# Altium PCB Cabinet_Device.PcbDoc (part 1 of 4)
Units mil, origin at the board's own origin, x right, y up, seen from the top; angles counter-clockwise.
Board outline 17790 x 10695 mil, 4 copper layers (Top Layer, Ground, Internal Plane 1, Bottom Layer), stack 30.634 mil thick; 515 components, 346 nets, 1467 pads, 176 vias.
Unrouted connection lines stored in the file: 677.
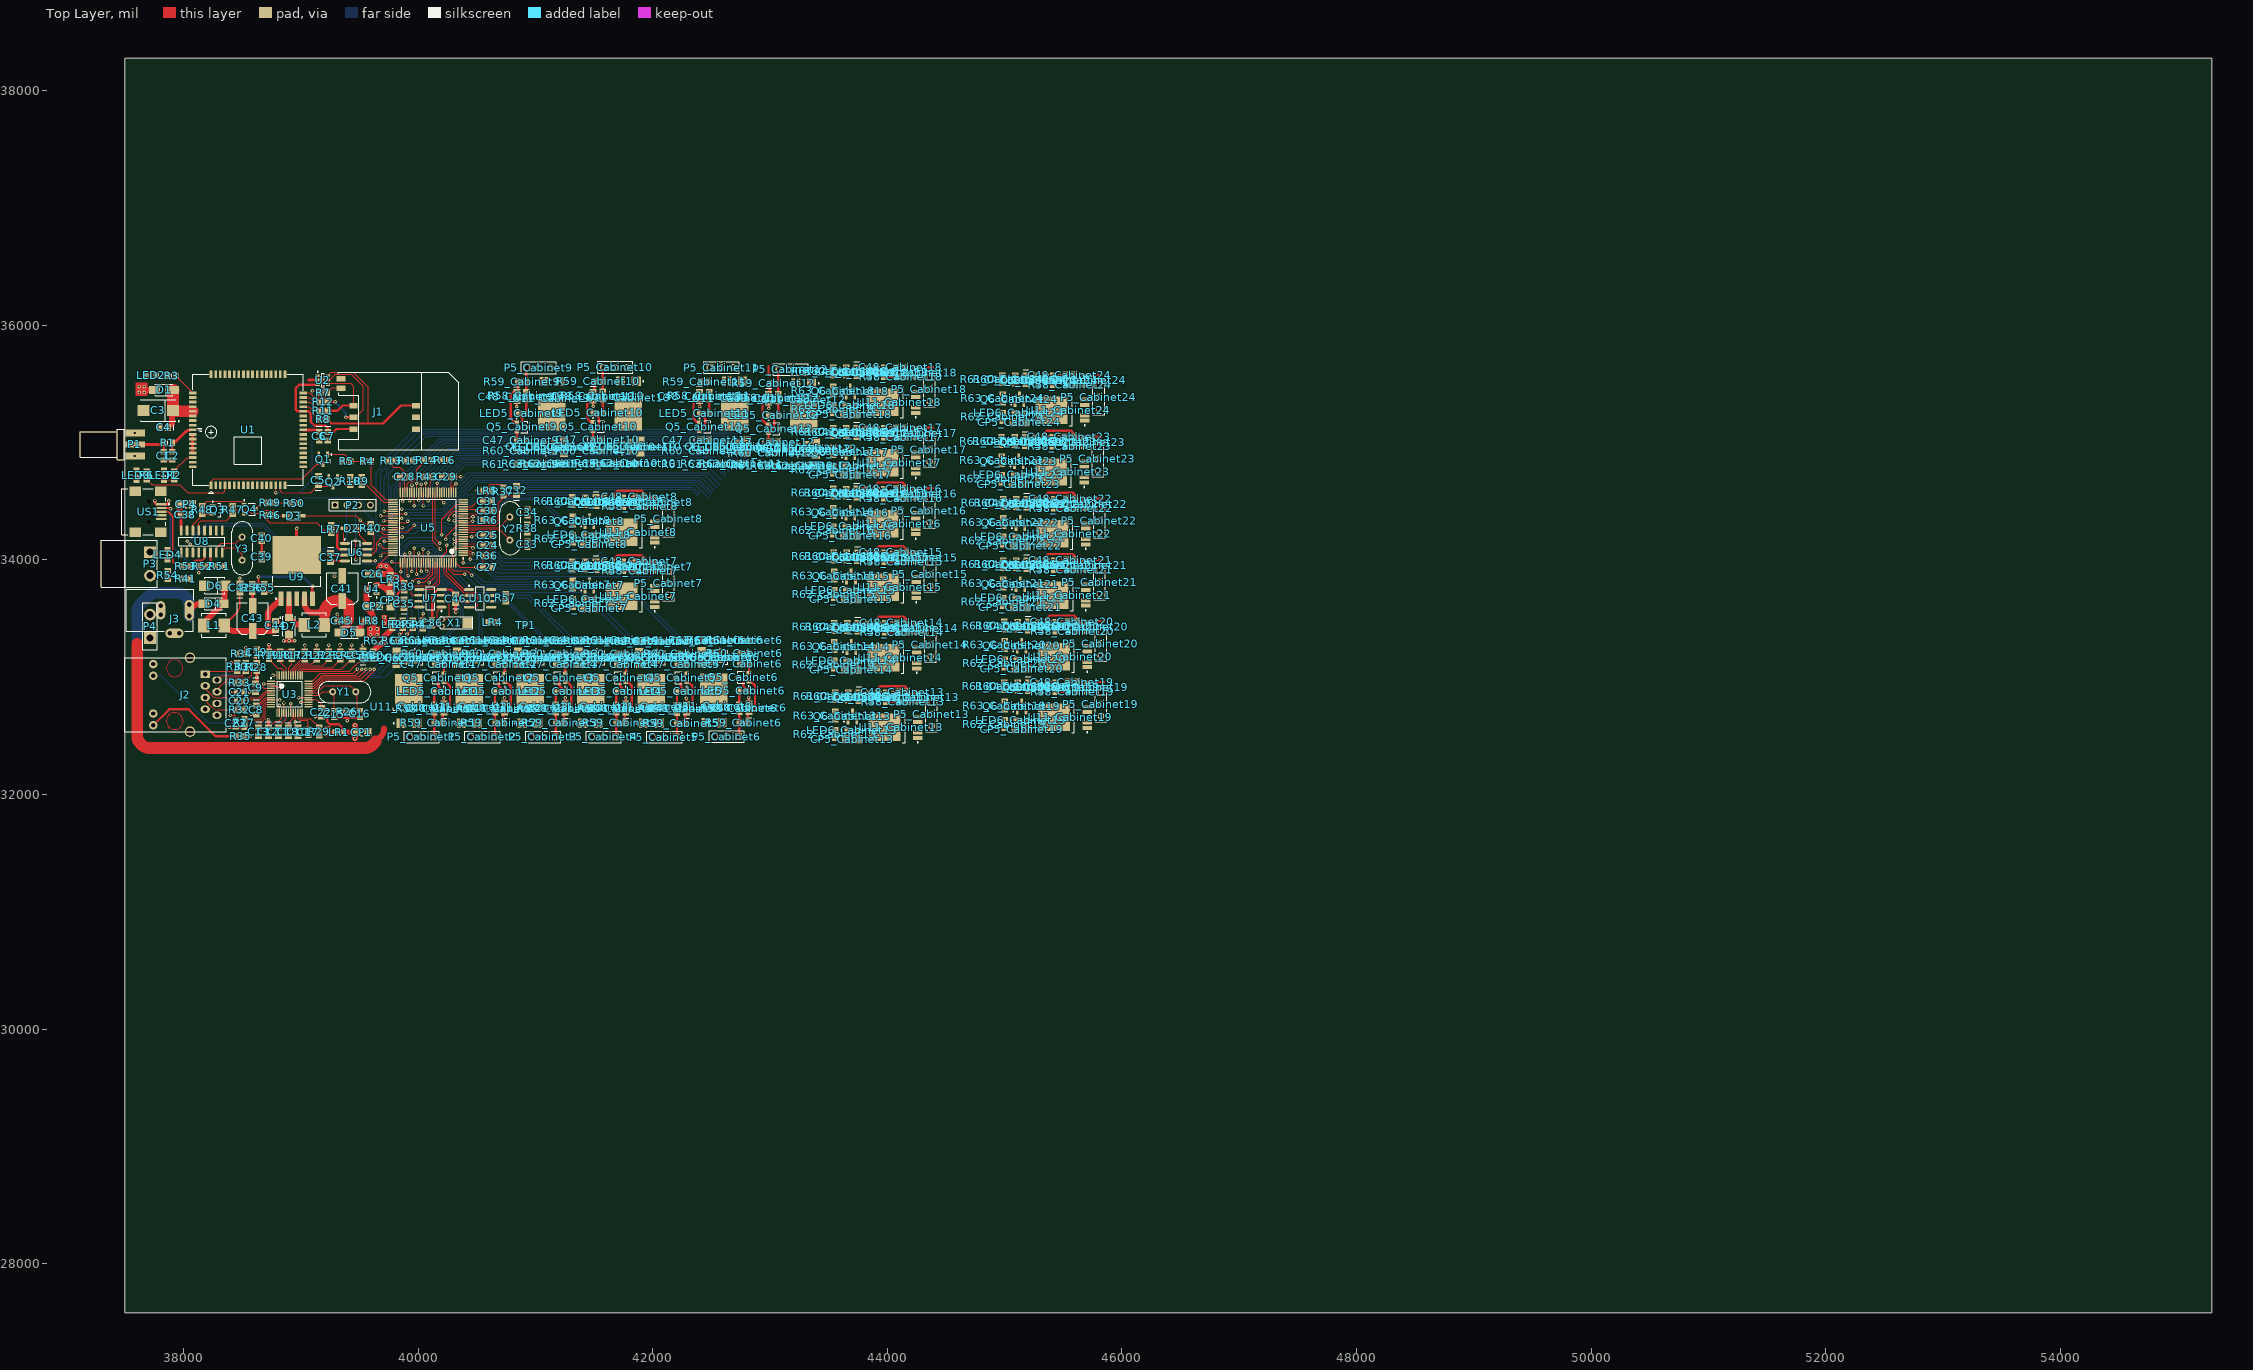
[diagram p0: Top Layer view]
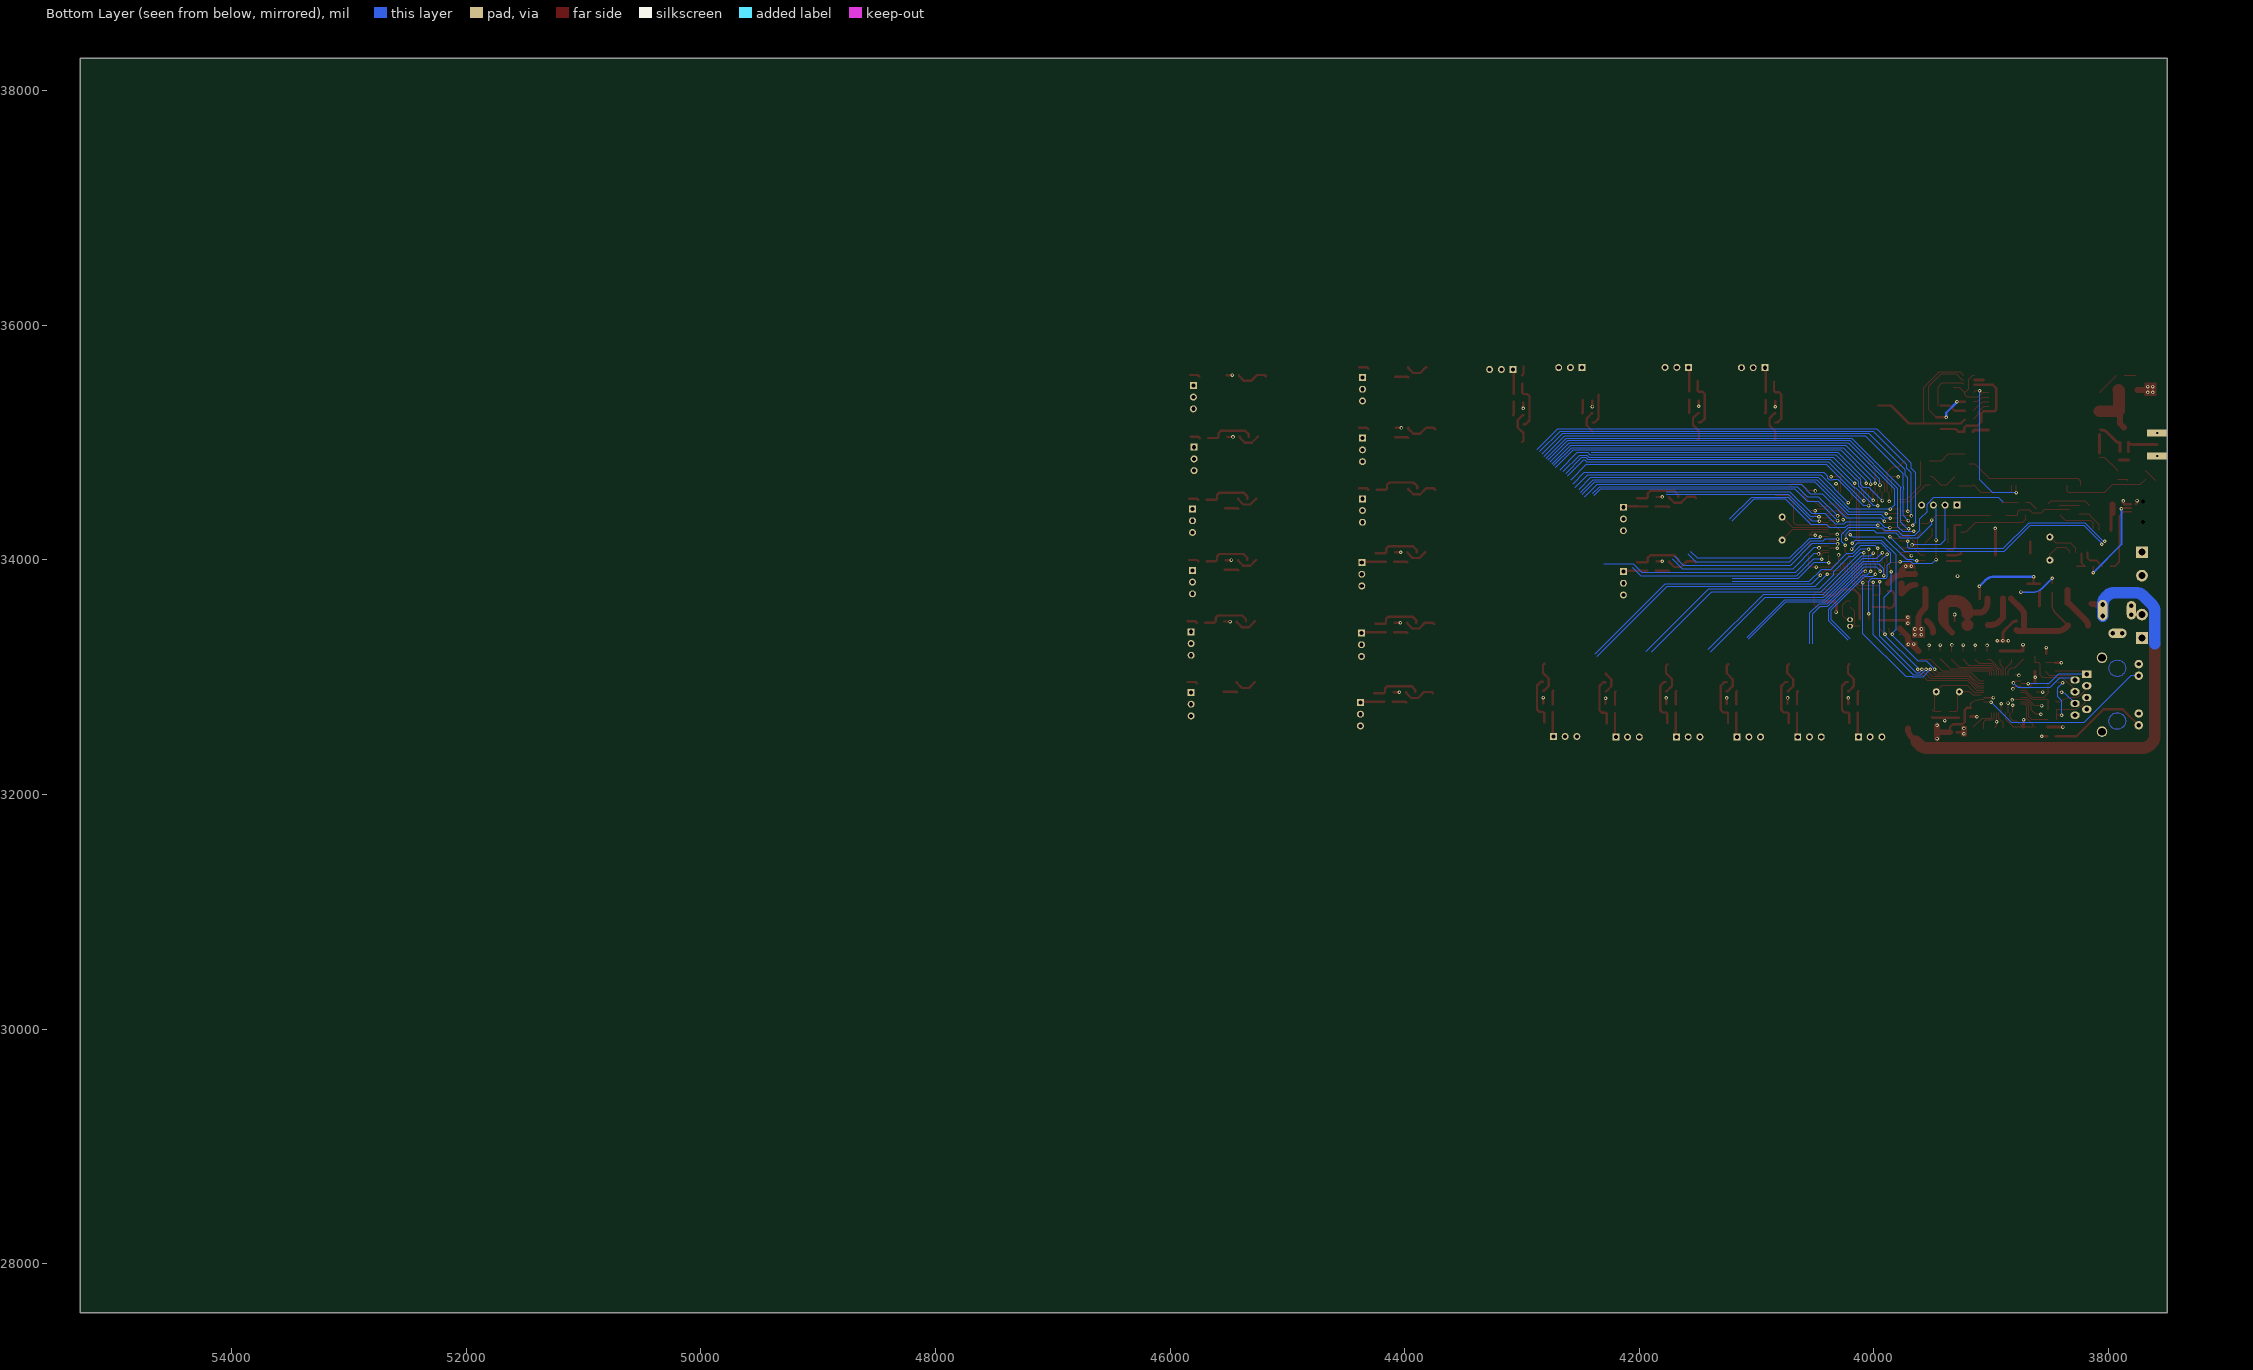
[diagram p1: Bottom Layer view, seen from below]
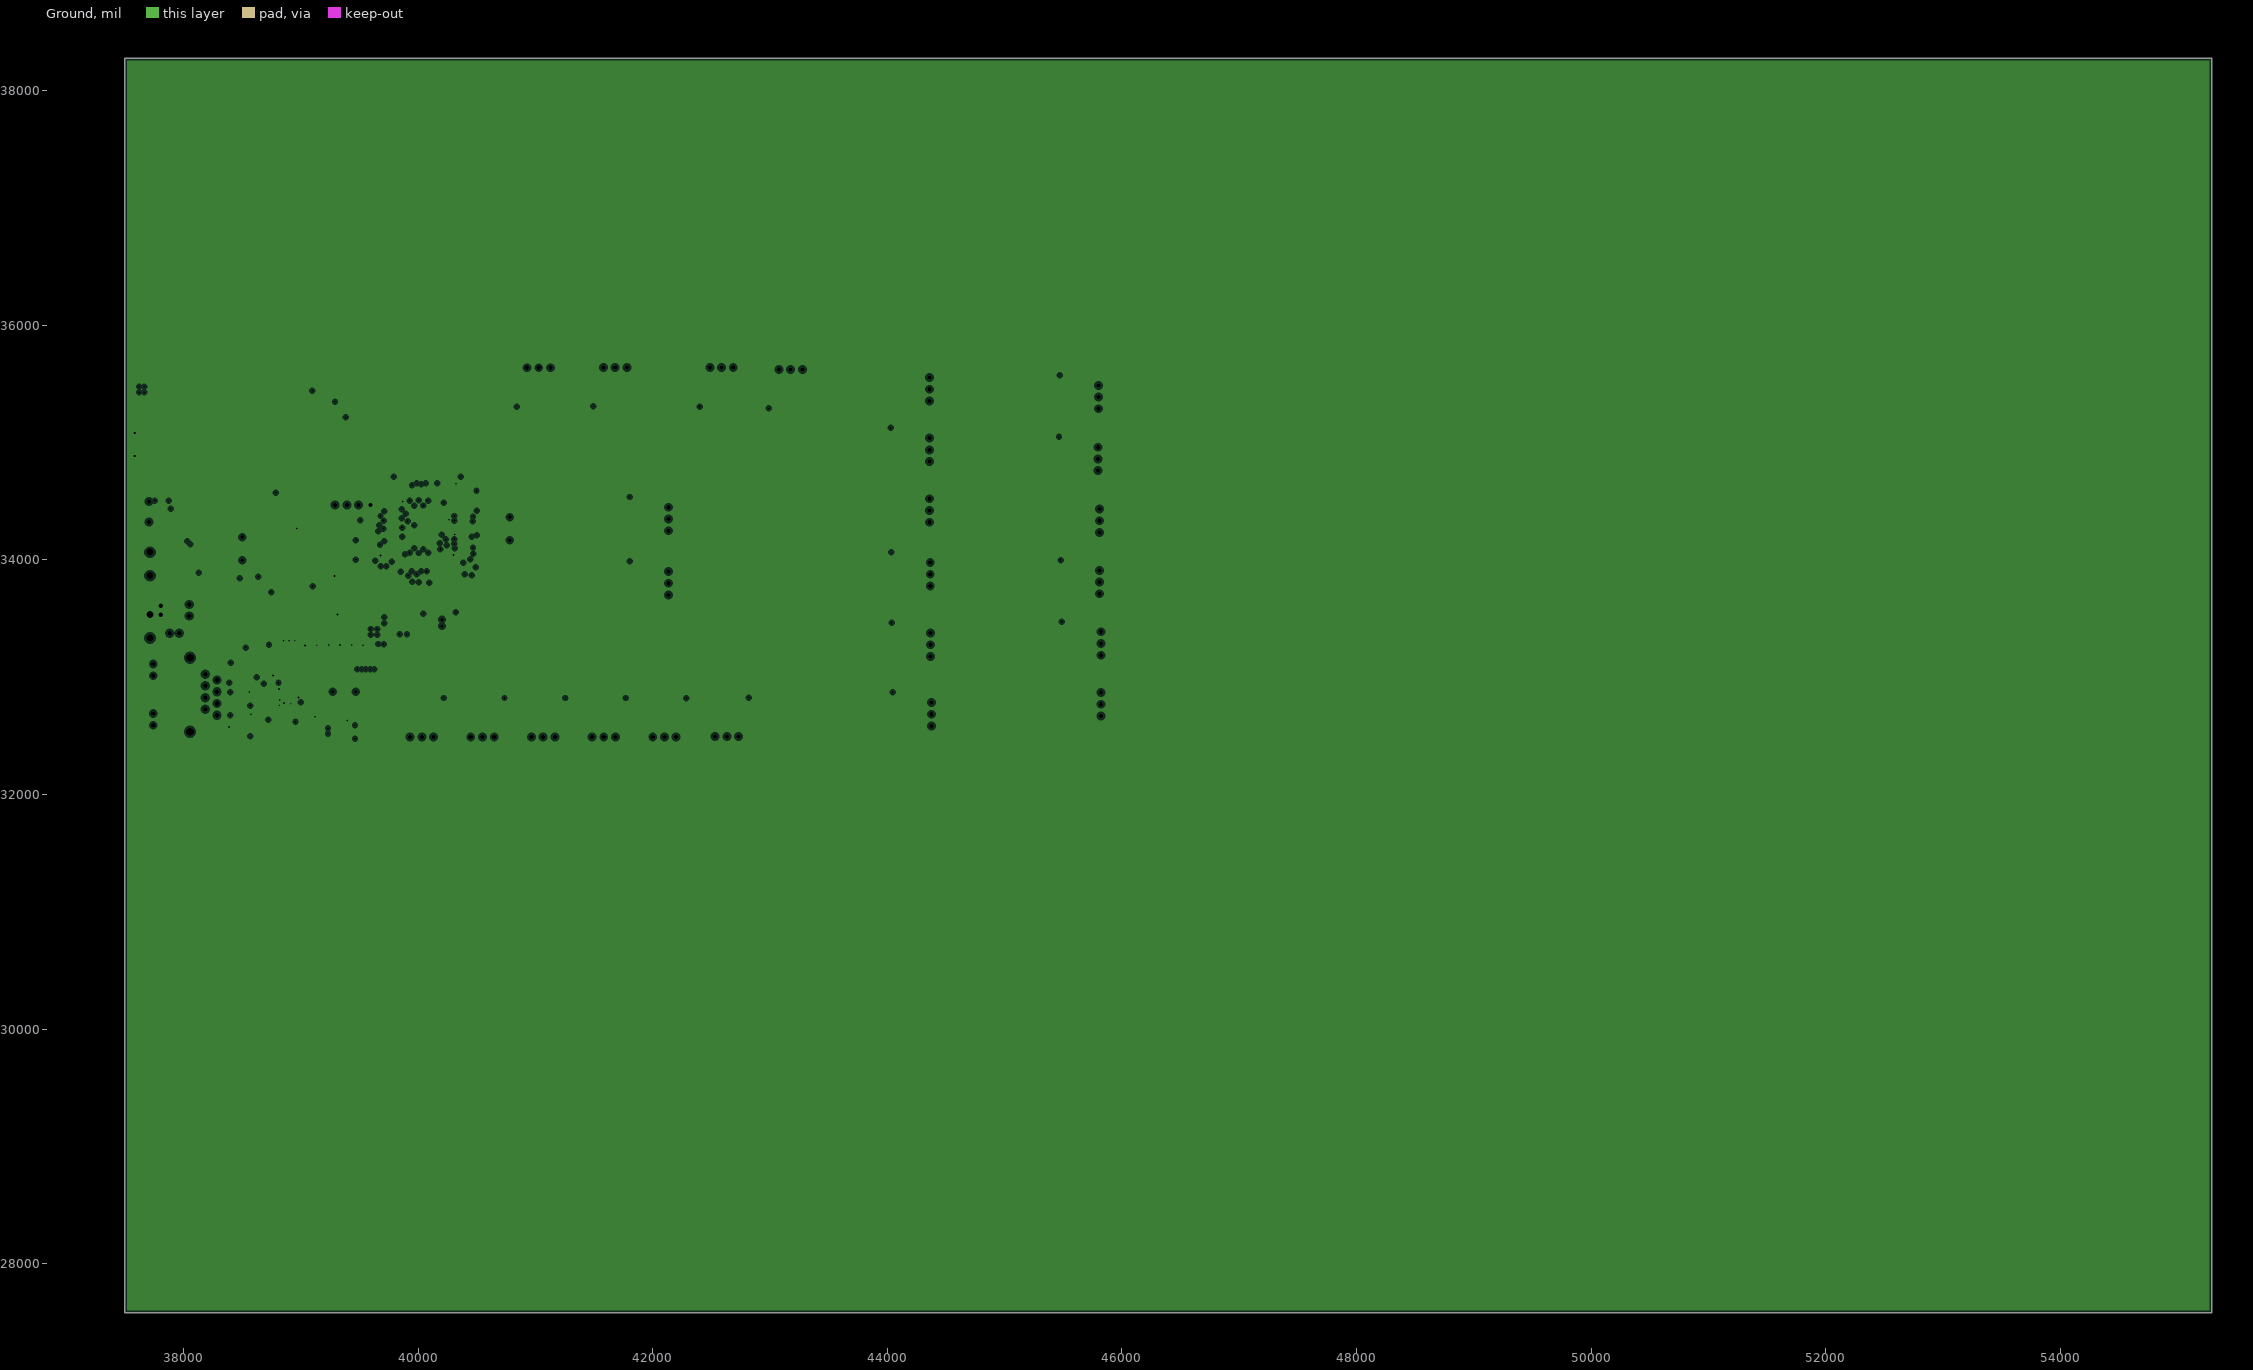
[diagram p2: Ground, clearances drawn from the general rule]
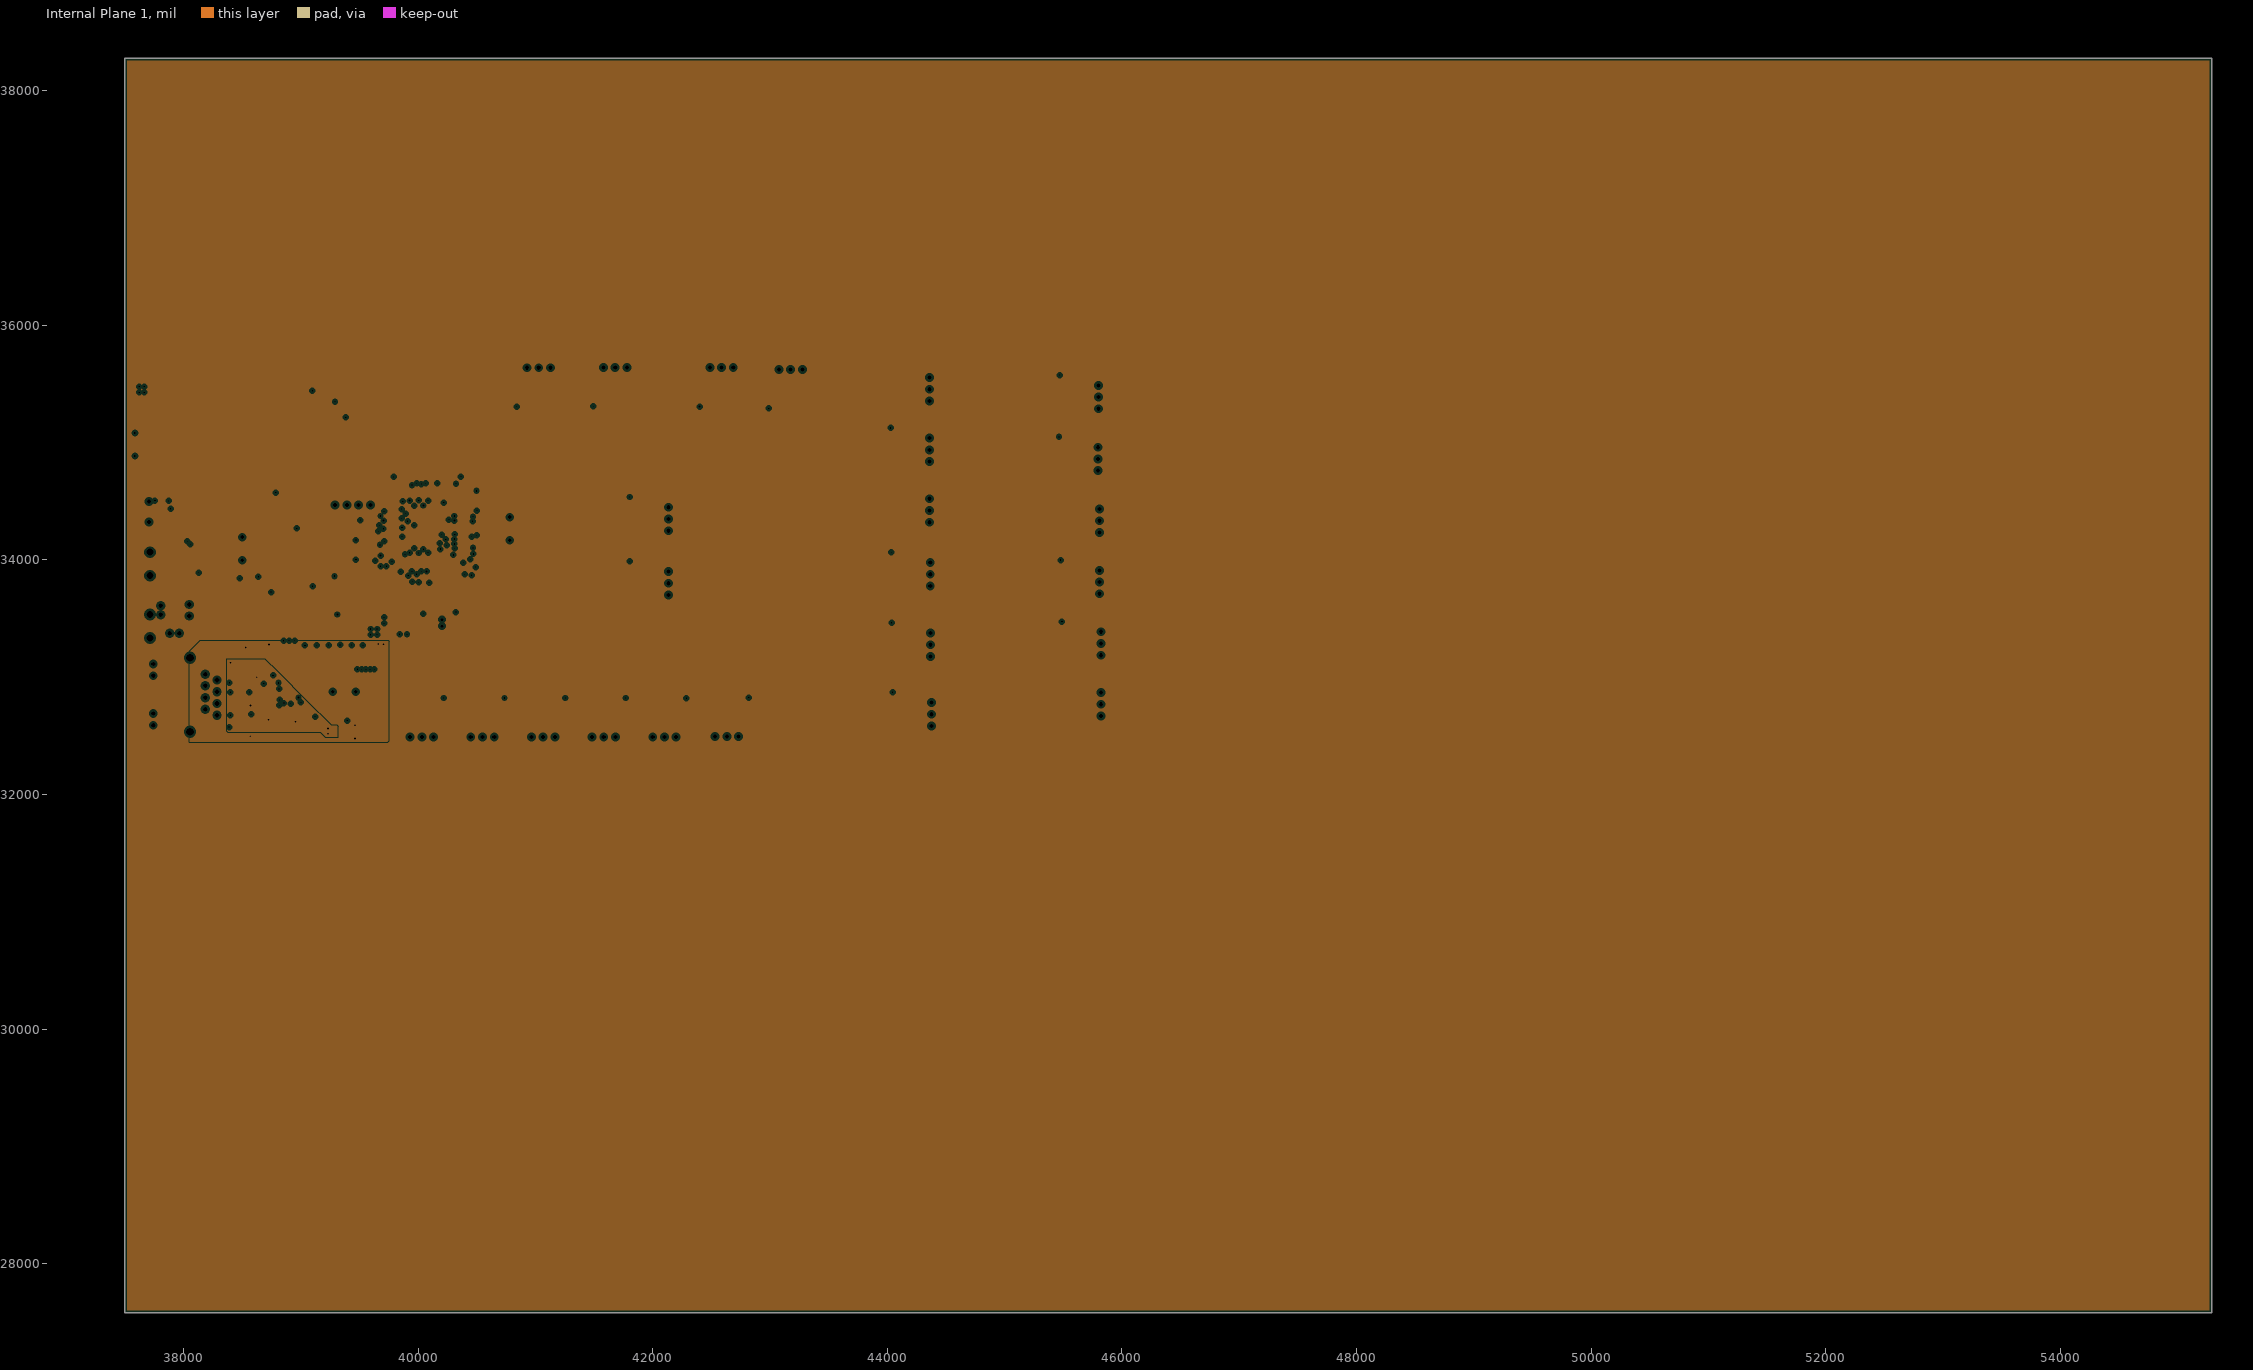
[diagram p3: Internal Plane 1, clearances drawn from the general rule]

## Layer stack, top to bottom
Top Solder: solder mask 0.4, Solder Resist, Dk 3.5
Top Layer: signal copper 1.4
Dielectric 1: core 10, FR-4, Dk 4.2
Ground: plane copper 1.417, net GND
Dielectric 3: core 10, Dk 4.2
Internal Plane 1: plane copper 1.417, net VDD3V3
Dielectric 4: prepreg 5, Dk 4.2
Bottom Layer: signal copper 1.4
Bottom Solder: solder mask 0.4, Solder Resist, Dk 3.5

## Board outline
37500,27580 55290,27580 55290,38275 37500,38275

## Design rules (kind name [scope] priority, off if disabled: settings)
Clearance [All] p1: gap=10
DiffPairsRouting [All] p1: maxlimit=10 minlimit=10 mostfreqgap=10 toplayer_minwidth=15 toplayer_maxwidth=15 toplayer_prefwidth=15 bottomlayer_minwidth=15 bottomlayer_maxwidth=15 bottomlayer_prefwidth=15 maxuncoupledlength=500
PlaneClearance [All] p1: clearance=20
PlaneConnect [All] p1: planeconnectstyle=Direct reliefexpansion=20 reliefentries=2 reliefconductorwidth=10 reliefairgap=10
PolygonConnect [All] p1: connectstyle=Relief reliefconductorwidth=10 reliefentries=4 polygonreliefangle="90 Angle" airgapwidth=10
RoomDefinition Cabinet24 [InComponentClass('Cabinet24')] p1: confinementstyle=ConfineIn formatcopy=TRUE lockcomponents=FALSE outline 45875,35122 45875,35639 44929.51,35639 44929.51,35122
RoomDefinition Cabinet23 [InComponentClass('Cabinet23')] p2: confinementstyle=ConfineIn formatcopy=TRUE lockcomponents=FALSE outline 45869,34595 45869,35112 44923.51,35112 44923.51,34595
RoomDefinition Cabinet22 [InComponentClass('Cabinet22')] p3: confinementstyle=ConfineIn formatcopy=TRUE lockcomponents=FALSE outline 45882,34068 45882,34585 44936.51,34585 44936.51,34068
RoomDefinition Cabinet21 [InComponentClass('Cabinet21')] p4: confinementstyle=ConfineIn formatcopy=TRUE lockcomponents=FALSE outline 45882.49,33545 45882.49,34062 44937,34062 44937,33545
RoomDefinition Cabinet20 [InComponentClass('Cabinet20')] p5: confinementstyle=ConfineIn formatcopy=TRUE lockcomponents=FALSE outline 45894,33021 45894,33538 44948.51,33538 44948.51,33021
RoomDefinition Cabinet19 [InComponentClass('Cabinet19')] p6: confinementstyle=ConfineIn formatcopy=TRUE lockcomponents=FALSE outline 45894,32504 45894,33021 44948.51,33021 44948.51,32504
RoomDefinition Cabinet18 [InComponentClass('Cabinet18')] p7: confinementstyle=ConfineIn formatcopy=TRUE lockcomponents=FALSE outline 44433,35189 44433,35706 43487.51,35706 43487.51,35189
RoomDefinition Cabinet17 [InComponentClass('Cabinet17')] p8: confinementstyle=ConfineIn formatcopy=TRUE lockcomponents=FALSE outline 44433,34672 44433,35189 43487.51,35189 43487.51,34672
RoomDefinition Cabinet16 [InComponentClass('Cabinet16')] p9: confinementstyle=ConfineIn formatcopy=TRUE lockcomponents=FALSE outline 44433,34155 44433,34672 43487.51,34672 43487.51,34155
RoomDefinition Cabinet15 [InComponentClass('Cabinet15')] p10: confinementstyle=ConfineIn formatcopy=TRUE lockcomponents=FALSE outline 44439,33612 44439,34129 43493.51,34129 43493.51,33612
RoomDefinition Cabinet14 [InComponentClass('Cabinet14')] p11: confinementstyle=ConfineIn formatcopy=TRUE lockcomponents=FALSE outline 44441.49,33011 44441.49,33528 43496,33528 43496,33011
RoomDefinition Cabinet13 [InComponentClass('Cabinet13')] p12: confinementstyle=ConfineIn formatcopy=TRUE lockcomponents=FALSE outline 44450.51,32418.76 44450.51,32935.76 43505.02,32935.76 43505.02,32418.76
RoomDefinition Cabinet12 [InComponentClass('Cabinet12')] p13: confinementstyle=ConfineIn formatcopy=TRUE lockcomponents=FALSE outline 43441,35696 42924,35696 42924,34750.51 43441,34750.51
RoomDefinition Cabinet11 [InComponentClass('Cabinet11')] p14: confinementstyle=ConfineIn formatcopy=TRUE lockcomponents=FALSE outline 42852,35712 42335,35712 42335,34766.51 42852,34766.51
RoomDefinition Cabinet10 [InComponentClass('Cabinet10')] p15: confinementstyle=ConfineIn formatcopy=TRUE lockcomponents=FALSE outline 41945,35714 41428,35714 41428,34768.51 41945,34768.51
RoomDefinition Cabinet9 [InComponentClass('Cabinet9')] p16: confinementstyle=ConfineIn formatcopy=TRUE lockcomponents=FALSE outline 41294,35711 40777,35711 40777,34765.51 41294,34765.51
RoomDefinition Cabinet8 [InComponentClass('Cabinet8')] p17: confinementstyle=ConfineIn formatcopy=TRUE lockcomponents=FALSE outline 42209,34083 42209,34600 41263.51,34600 41263.51,34083
RoomDefinition Cabinet7 [InComponentClass('Cabinet7')] p18: confinementstyle=ConfineIn formatcopy=TRUE lockcomponents=FALSE outline 42209,33535 42209,34052 41263.51,34052 41263.51,33535
RoomDefinition Cabinet6 [InComponentClass('Cabinet6')] p19: confinementstyle=ConfineIn formatcopy=TRUE lockcomponents=FALSE outline 42367,32420 42884,32420 42884,33365.49 42367,33365.49
RoomDefinition Cabinet5 [InComponentClass('Cabinet5')] p20: confinementstyle=ConfineIn formatcopy=TRUE lockcomponents=FALSE outline 41835,32415 42352,32415 42352,33360.49 41835,33360.49
RoomDefinition Cabinet4 [InComponentClass('Cabinet4')] p21: confinementstyle=ConfineIn formatcopy=TRUE lockcomponents=FALSE outline 41318,32416.51 41835,32416.51 41835,33362 41318,33362
RoomDefinition Cabinet3 [InComponentClass('Cabinet3')] p22: confinementstyle=ConfineIn formatcopy=TRUE lockcomponents=FALSE outline 40801,32416.51 41318,32416.51 41318,33362 40801,33362
RoomDefinition Cabinet2 [InComponentClass('Cabinet2')] p23: confinementstyle=ConfineIn formatcopy=TRUE lockcomponents=FALSE outline 40284,32416.51 40801,32416.51 40801,33362 40284,33362
RoomDefinition Cabinet1 [InComponentClass('Cabinet1')] p24: confinementstyle=ConfineIn formatcopy=TRUE lockcomponents=FALSE outline 39767,32416.51 40284,32416.51 40284,33362 39767,33362
RoomDefinition 中央处理器 [InComponentClass('中央处理器')] p25: confinementstyle=ConfineIn formatcopy=TRUE lockcomponents=FALSE outline 38968,33365 41036,33365 41036,34770 38968,34770
RoomDefinition 网络接口 [InComponentClass('网络接口')] p26: confinementstyle=ConfineIn formatcopy=TRUE lockcomponents=FALSE outline 37468.87,32451.24 39770.43,32451.24 39770.43,33314.9 37468.87,33314.9
RoomDefinition 系统电源 [InComponentClass('系统电源')] p27: confinementstyle=ConfineIn formatcopy=TRUE lockcomponents=FALSE outline 37145,32725 39745,32725 39745,34780 37145,34780
RoomDefinition 一键下载 [InComponentClass('一键下载')] p28: confinementstyle=ConfineIn formatcopy=TRUE lockcomponents=FALSE outline 37425,33795 41011,33795 41011,34655 37425,34655
RoomDefinition GSM接口 [InComponentClass('GSM接口')] p29: confinementstyle=ConfineIn formatcopy=TRUE lockcomponents=FALSE outline 37085,34551.34 40365,34551.34 40365,35666.34 37085,35666.34
RoomDefinition CAN接口 [InComponentClass('CAN接口')] p30: confinementstyle=ConfineIn formatcopy=TRUE lockcomponents=FALSE outline 40264,33394 40844,33394 40844,33839 40264,33839
RoutingVias [All] p1: holewidth=28 width=50 viastyle="Through Hole" minholewidth=10 minwidth=25 maxholewidth=28 maxwidth=50
SolderMaskExpansion [All] p1: expansion=4
UnpouredPolygon [All] p1: allowunpoured=FALSE
Width [All] p1: maxlimit=100 minlimit=10 preferedwidth=10
26 further rules are at their usual default settings.

## Classes and differential pairs
component class Cabinet1: C47_Cabinet1 C48_Cabinet1 CP5_Cabinet1 LED5_Cabinet1 LED6_Cabinet1 P5_Cabinet1 Q5_Cabinet1 Q6_Cabinet1 R58_Cabinet1 R59_Cabinet1 R60_Cabinet1 R61_Cabinet1 R62_Cabinet1 R63_Cabinet1 U11_Cabinet1
component class Cabinet2: C47_Cabinet2 C48_Cabinet2 CP5_Cabinet2 LED5_Cabinet2 LED6_Cabinet2 P5_Cabinet2 Q5_Cabinet2 Q6_Cabinet2 R58_Cabinet2 R59_Cabinet2 R60_Cabinet2 R61_Cabinet2 R62_Cabinet2 R63_Cabinet2 U11_Cabinet2
component class Cabinet3: C47_Cabinet3 C48_Cabinet3 CP5_Cabinet3 LED5_Cabinet3 LED6_Cabinet3 P5_Cabinet3 Q5_Cabinet3 Q6_Cabinet3 R58_Cabinet3 R59_Cabinet3 R60_Cabinet3 R61_Cabinet3 R62_Cabinet3 R63_Cabinet3 U11_Cabinet3
component class Cabinet4: C47_Cabinet4 C48_Cabinet4 CP5_Cabinet4 LED5_Cabinet4 LED6_Cabinet4 P5_Cabinet4 Q5_Cabinet4 Q6_Cabinet4 R58_Cabinet4 R59_Cabinet4 R60_Cabinet4 R61_Cabinet4 R62_Cabinet4 R63_Cabinet4 U11_Cabinet4
component class Cabinet5: C47_Cabinet5 C48_Cabinet5 CP5_Cabinet5 LED5_Cabinet5 LED6_Cabinet5 P5_Cabinet5 Q5_Cabinet5 Q6_Cabinet5 R58_Cabinet5 R59_Cabinet5 R60_Cabinet5 R61_Cabinet5 R62_Cabinet5 R63_Cabinet5 U11_Cabinet5
component class Cabinet6: C47_Cabinet6 C48_Cabinet6 CP5_Cabinet6 LED5_Cabinet6 LED6_Cabinet6 P5_Cabinet6 Q5_Cabinet6 Q6_Cabinet6 R58_Cabinet6 R59_Cabinet6 R60_Cabinet6 R61_Cabinet6 R62_Cabinet6 R63_Cabinet6 U11_Cabinet6
component class Cabinet7: C47_Cabinet7 C48_Cabinet7 CP5_Cabinet7 LED5_Cabinet7 LED6_Cabinet7 P5_Cabinet7 Q5_Cabinet7 Q6_Cabinet7 R58_Cabinet7 R59_Cabinet7 R60_Cabinet7 R61_Cabinet7 R62_Cabinet7 R63_Cabinet7 U11_Cabinet7
component class Cabinet8: C47_Cabinet8 C48_Cabinet8 CP5_Cabinet8 LED5_Cabinet8 LED6_Cabinet8 P5_Cabinet8 Q5_Cabinet8 Q6_Cabinet8 R58_Cabinet8 R59_Cabinet8 R60_Cabinet8 R61_Cabinet8 R62_Cabinet8 R63_Cabinet8 U11_Cabinet8
component class Cabinet9: C47_Cabinet9 C48_Cabinet9 CP5_Cabinet9 LED5_Cabinet9 LED6_Cabinet9 P5_Cabinet9 Q5_Cabinet9 Q6_Cabinet9 R58_Cabinet9 R59_Cabinet9 R60_Cabinet9 R61_Cabinet9 R62_Cabinet9 R63_Cabinet9 U11_Cabinet9
component class Cabinet10: C47_Cabinet10 C48_Cabinet10 CP5_Cabinet10 LED5_Cabinet10 LED6_Cabinet10 P5_Cabinet10 Q5_Cabinet10 Q6_Cabinet10 R58_Cabinet10 R59_Cabinet10 R60_Cabinet10 R61_Cabinet10 R62_Cabinet10 R63_Cabinet10 U11_Cabinet10
component class Cabinet11: C47_Cabinet11 C48_Cabinet11 CP5_Cabinet11 LED5_Cabinet11 LED6_Cabinet11 P5_Cabinet11 Q5_Cabinet11 Q6_Cabinet11 R58_Cabinet11 R59_Cabinet11 R60_Cabinet11 R61_Cabinet11 R62_Cabinet11 R63_Cabinet11 U11_Cabinet11
component class Cabinet12: C47_Cabinet12 C48_Cabinet12 CP5_Cabinet12 LED5_Cabinet12 LED6_Cabinet12 P5_Cabinet12 Q5_Cabinet12 Q6_Cabinet12 R58_Cabinet12 R59_Cabinet12 R60_Cabinet12 R61_Cabinet12 R62_Cabinet12 R63_Cabinet12 U11_Cabinet12
component class Cabinet13: C47_Cabinet13 C48_Cabinet13 CP5_Cabinet13 LED5_Cabinet13 LED6_Cabinet13 P5_Cabinet13 Q5_Cabinet13 Q6_Cabinet13 R58_Cabinet13 R59_Cabinet13 R60_Cabinet13 R61_Cabinet13 R62_Cabinet13 R63_Cabinet13 U11_Cabinet13
component class Cabinet14: C47_Cabinet14 C48_Cabinet14 CP5_Cabinet14 LED5_Cabinet14 LED6_Cabinet14 P5_Cabinet14 Q5_Cabinet14 Q6_Cabinet14 R58_Cabinet14 R59_Cabinet14 R60_Cabinet14 R61_Cabinet14 R62_Cabinet14 R63_Cabinet14 U11_Cabinet14
component class Cabinet15: C47_Cabinet15 C48_Cabinet15 CP5_Cabinet15 LED5_Cabinet15 LED6_Cabinet15 P5_Cabinet15 Q5_Cabinet15 Q6_Cabinet15 R58_Cabinet15 R59_Cabinet15 R60_Cabinet15 R61_Cabinet15 R62_Cabinet15 R63_Cabinet15 U11_Cabinet15
component class Cabinet16: C47_Cabinet16 C48_Cabinet16 CP5_Cabinet16 LED5_Cabinet16 LED6_Cabinet16 P5_Cabinet16 Q5_Cabinet16 Q6_Cabinet16 R58_Cabinet16 R59_Cabinet16 R60_Cabinet16 R61_Cabinet16 R62_Cabinet16 R63_Cabinet16 U11_Cabinet16
component class Cabinet17: C47_Cabinet17 C48_Cabinet17 CP5_Cabinet17 LED5_Cabinet17 LED6_Cabinet17 P5_Cabinet17 Q5_Cabinet17 Q6_Cabinet17 R58_Cabinet17 R59_Cabinet17 R60_Cabinet17 R61_Cabinet17 R62_Cabinet17 R63_Cabinet17 U11_Cabinet17
component class Cabinet18: C47_Cabinet18 C48_Cabinet18 CP5_Cabinet18 LED5_Cabinet18 LED6_Cabinet18 P5_Cabinet18 Q5_Cabinet18 Q6_Cabinet18 R58_Cabinet18 R59_Cabinet18 R60_Cabinet18 R61_Cabinet18 R62_Cabinet18 R63_Cabinet18 U11_Cabinet18
component class Cabinet19: C47_Cabinet19 C48_Cabinet19 CP5_Cabinet19 LED5_Cabinet19 LED6_Cabinet19 P5_Cabinet19 Q5_Cabinet19 Q6_Cabinet19 R58_Cabinet19 R59_Cabinet19 R60_Cabinet19 R61_Cabinet19 R62_Cabinet19 R63_Cabinet19 U11_Cabinet19
component class Cabinet20: C47_Cabinet20 C48_Cabinet20 CP5_Cabinet20 LED5_Cabinet20 LED6_Cabinet20 P5_Cabinet20 Q5_Cabinet20 Q6_Cabinet20 R58_Cabinet20 R59_Cabinet20 R60_Cabinet20 R61_Cabinet20 R62_Cabinet20 R63_Cabinet20 U11_Cabinet20
component class Cabinet21: C47_Cabinet21 C48_Cabinet21 CP5_Cabinet21 LED5_Cabinet21 LED6_Cabinet21 P5_Cabinet21 Q5_Cabinet21 Q6_Cabinet21 R58_Cabinet21 R59_Cabinet21 R60_Cabinet21 R61_Cabinet21 R62_Cabinet21 R63_Cabinet21 U11_Cabinet21
component class Cabinet22: C47_Cabinet22 C48_Cabinet22 CP5_Cabinet22 LED5_Cabinet22 LED6_Cabinet22 P5_Cabinet22 Q5_Cabinet22 Q6_Cabinet22 R58_Cabinet22 R59_Cabinet22 R60_Cabinet22 R61_Cabinet22 R62_Cabinet22 R63_Cabinet22 U11_Cabinet22
component class Cabinet23: C47_Cabinet23 C48_Cabinet23 CP5_Cabinet23 LED5_Cabinet23 LED6_Cabinet23 P5_Cabinet23 Q5_Cabinet23 Q6_Cabinet23 R58_Cabinet23 R59_Cabinet23 R60_Cabinet23 R61_Cabinet23 R62_Cabinet23 R63_Cabinet23 U11_Cabinet23
component class Cabinet24: C47_Cabinet24 C48_Cabinet24 CP5_Cabinet24 LED5_Cabinet24 LED6_Cabinet24 P5_Cabinet24 Q5_Cabinet24 Q6_Cabinet24 R58_Cabinet24 R59_Cabinet24 R60_Cabinet24 R61_Cabinet24 R62_Cabinet24 R63_Cabinet24 U11_Cabinet24
component class CAN接口: C46 P3 P4 R57 U10
component class GSM接口: C1 C2 C3 C4 C5 C6 C7 D1 J1 LED1 LED2 LED3 P1 Q1 Q2 R1 R2 R3 R4 R5 R6 R7 R8 R9 R10 R11 R12 R13 R14 R15 R16 U1 U2
component class 一键下载: C38 C39 C40 CP4 D3 LR7 P2 Q3 Q4 R46 R47 R48 R49 R50 R51 R52 R53 U8 US1 Y3
component class 系统电源: C41 C42 C43 C44 C45 D4 D5 D6 D7 J3 L1 L2 LED4 LR8 R54 R55 R56 U9
component class 网络接口: C8 C9 C10 C11 C12 C13 C14 C15 C16 C17 C18 C19 C20 C21 C22 C23 CP1 J2 LR1 R17 R18 R19 R20 R21 R22 R23 R24 R25 R26 R27 R28 R29 R30 R31 R32 R33 R34 R35 U3 Y1
component class 中央处理器: C24 C25 C26 C27 C28 C29 C30 C31 C32 C33 C34 C35 C36 C37 CP2 CP3 D2 LR2 LR3 LR4 LR5 LR6 R36 R37 R38 R39 R40 R41 R42 R43 R44 R45 TP1 U4 U5 U6 U7 X1 Y2
channel class Door: Cabinet1 Cabinet2 Cabinet3 Cabinet4 Cabinet5 Cabinet6 Cabinet7 Cabinet8 Cabinet9 Cabinet10 Cabinet11 Cabinet12 Cabinet13 Cabinet14 Cabinet15 Cabinet16 Cabinet17 Cabinet18 Cabinet19 Cabinet20 Cabinet21 Cabinet22 Cabinet23 Cabinet24
differential pair USB1: +USB1_P -USB1_N

## Components (designator, comment, footprint, x,y, rotation, side; value= is the part's Value field where it differs from the comment)
C1 "NC" 2012[0805] 37830,34886.91 r270 top
C2 "NC" 2012[0805] 37905,34886.91 r270 top
C3 "1000uF/6.3V" 7343[2917]CT 37785,35272.91 r180 top
C4 "CAP 100nF 50V 0805(2012)" 2012[0805]06CD 37832,35128 r180 top
C5 "CAP 100nF 50V 0805(2012)" 2012[0805]06CD 39150,34676.34 r90 top
C6 "CAP 100nF 50V 0805(2012)" 2012[0805]06CD 39157,35054 r270 top
C7 "CAP 100nF 50V 0805(2012)" 2012[0805]06CD 39230,35054 r270 top
C8 "CAP 100nF 50V 0805(2012)" 2012[0805]06CD 38620,32720 r270 top
C9 "CAP 100nF 50V 0805(2012)" 2012[0805]06CD 38615,32910 r270 top
C10 "CAP 100nF 50V 0805(2012)" 2012[0805]06CD 38975.43,32535 r270 top
C11 "CAP 100nF 50V 0805(2012)" 2012[0805]06CD 38810.43,32535 r270 top
C12 "CAP 100nF 50V 0805(2012)" 2012[0805]06CD 38723.76,32535 r270 top
C13 "CAP 100nF 50V 0805(2012)" 2012[0805]06CD 38640,32535 r270 top
C14 "CAP 100nF 50V 0805(2012)" 2012[0805]06CD 39530,33189 r90 top
C15 "CAP 18pF 50V 0805(2012)" 2012[0805]100_L 39285,32685 r90 top
C16 "CAP 18pF 50V 0805(2012)" 2012[0805]100_L 39504,32686 r90 top
C17 "CAP 10nF 50V 0805(2012)" 2012[0805]100_L 39065.43,32530 r90 top
C18 "CAP 4.7uF 50V 0805(2012)" 2012[0805]13CD 38895,32535 r270 top
C19 "CAP 22nF 50V 0805(2012)" 2012[0805]100_L 38625,33210 r270 top
C20 "CAP 6.8nF 50V 0805(2012)" 2012[0805]100_L 38478.76,32796.24 r180 top
C21 "CAP 6.8nF 50V 0805(2012)" 2012[0805]100_L 38478.76,32871.24 r180 top
C22 "CAP 100nF 50V 0805(2012)" 2012[0805]06CD 39175,32700 r270 top
C23 "CAP 10nF 50V 0805(2012)" 2012[0805]100_L 38445,32605 r90 top
C24 "CAP 100nF 50V 0805(2012)" 2012[0805]06CD 40594,34124 r0 top
C25 "CAP 100nF 50V 0805(2012)" 2012[0805]06CD 40594,34210 r0 top
C26 "CAP 100nF 50V 0805(2012)" 2012[0805]06CD 39610,33880 r180 top
C27 "CAP 100nF 50V 0805(2012)" 2012[0805]06CD 40592,33938 r0 top
C28 "CAP 100nF 50V 0805(2012)" 2012[0805]06CD 39885,34706 r0 top
C29 "CAP 100nF 50V 0805(2012)" 2012[0805]06CD 40241,34709 r180 top
C30 "CAP 100nF 50V 0805(2012)" 2012[0805]06CD 40593,34419 r0 top
C31 "CAP 100nF 50V 0805(2012)" 2012[0805]06CD 40592,34501 r0 top
C32 "CAP 100nF 50V 0805(2012)" 2012[0805]06CD 40839,34591 r90 top
C33 "CAP 18pF 50V 0805(2012)" 2012[0805]100_L 40932,34133 r270 top
C34 "CAP 18pF 50V 0805(2012)" 2012[0805]100_L 40932,34404 r90 top
C35 "CAP 100nF 50V 0805(2012)" 2012[0805]06CD 39880,33625 r90 top
C36 "CAP 18pF 50V 0805(2012)" 2012[0805]100_L 40119,33463 r90 top
C37 "CAP 100nF 50V 0805(2012)" 2012[0805]06CD 39255,34020 r270 top
C38 "CAP 100nF 50V 0805(2012)" 2012[0805]06CD 38015,34385 r0 top
C39 "CAP 18pF 50V 0805(2012)" 2012[0805]100_L 38668,34025 r90 top
C40 "CAP 18pF 50V 0805(2012)" 2012[0805]100_L 38667,34184 r270 top
C41 "UUD1A101MCL1GS" NIC-CAPA2-6.3X5.8_V 39355,33755 r90 top
C42 "CAP 100nF 50V 0805(2012)" 2012[0805]06CD 38480,33760 r90 top
C43 "UUD1E101MCL1GS" NIC-CAPA2-6.3X7.7_V 38590,33500 r90 top
C44 "CAP 100nF 50V 0805(2012)" 2012[0805]06CD 38785,33440 r90 top
C45 "CAP 100nF 50V 0805(2012)" 2012[0805]06CD 39350,33480 r180 top
C46 "0.1uF" 2012[0805]06CD 40320,33668 r90 top
C47_Cabinet1 "CAP 100nF 50V 0805(2012)" 2012[0805]06CD 40180.43,33109 r180 top (schematic designator C47)
C47_Cabinet2 "CAP 100nF 50V 0805(2012)" 2012[0805]06CD 40697.43,33109 r180 top (schematic designator C47)
C47_Cabinet3 "CAP 100nF 50V 0805(2012)" 2012[0805]06CD 41214.43,33109 r180 top (schematic designator C47)
C47_Cabinet4 "CAP 100nF 50V 0805(2012)" 2012[0805]06CD 41731.43,33109 r180 top (schematic designator C47)
C47_Cabinet5 "CAP 100nF 50V 0805(2012)" 2012[0805]06CD 42248.43,33107.49 r180 top (schematic designator C47)
C47_Cabinet6 "CAP 100nF 50V 0805(2012)" 2012[0805]06CD 42780.43,33112.49 r180 top (schematic designator C47)
C47_Cabinet7 "CAP 100nF 50V 0805(2012)" 2012[0805]06CD 41516.51,33948.43 r270 top (schematic designator C47)
C47_Cabinet8 "CAP 100nF 50V 0805(2012)" 2012[0805]06CD 41516.51,34496.43 r270 top (schematic designator C47)
C47_Cabinet9 "CAP 100nF 50V 0805(2012)" 2012[0805]06CD 40880.57,35018.51 r0 top (schematic designator C47)
C47_Cabinet10 "CAP 100nF 50V 0805(2012)" 2012[0805]06CD 41531.57,35021.51 r0 top (schematic designator C47)
C47_Cabinet11 "CAP 100nF 50V 0805(2012)" 2012[0805]06CD 42438.57,35019.51 r0 top (schematic designator C47)
C47_Cabinet12 "CAP 100nF 50V 0805(2012)" 2012[0805]06CD 43027.57,35003.51 r0 top (schematic designator C47)
C47_Cabinet13 "CAP 100nF 50V 0805(2012)" 2012[0805]06CD 43758.02,32832.2 r270 top (schematic designator C47)
C47_Cabinet14 "CAP 100nF 50V 0805(2012)" 2012[0805]06CD 43749,33424.43 r270 top (schematic designator C47)
C47_Cabinet15 "CAP 100nF 50V 0805(2012)" 2012[0805]06CD 43746.51,34025.43 r270 top (schematic designator C47)
C47_Cabinet16 "CAP 100nF 50V 0805(2012)" 2012[0805]06CD 43740.51,34568.43 r270 top (schematic designator C47)
C47_Cabinet17 "CAP 100nF 50V 0805(2012)" 2012[0805]06CD 43740.51,35085.43 r270 top (schematic designator C47)
C47_Cabinet18 "CAP 100nF 50V 0805(2012)" 2012[0805]06CD 43740.51,35602.43 r270 top (schematic designator C47)
C47_Cabinet19 "CAP 100nF 50V 0805(2012)" 2012[0805]06CD 45201.51,32917.43 r270 top (schematic designator C47)
C47_Cabinet20 "CAP 100nF 50V 0805(2012)" 2012[0805]06CD 45201.51,33434.43 r270 top (schematic designator C47)
C47_Cabinet21 "CAP 100nF 50V 0805(2012)" 2012[0805]06CD 45190,33958.43 r270 top (schematic designator C47)
C47_Cabinet22 "CAP 100nF 50V 0805(2012)" 2012[0805]06CD 45189.51,34481.43 r270 top (schematic designator C47)
C47_Cabinet23 "CAP 100nF 50V 0805(2012)" 2012[0805]06CD 45176.51,35008.43 r270 top (schematic designator C47)
C47_Cabinet24 "CAP 100nF 50V 0805(2012)" 2012[0805]06CD 45182.51,35535.43 r270 top (schematic designator C47)
C48_Cabinet1 "CAP 100nF 50V 0805(2012)" 2012[0805]06CD 40219.43,32736 r90 top (schematic designator C48)
C48_Cabinet2 "CAP 100nF 50V 0805(2012)" 2012[0805]06CD 40736.43,32736 r90 top (schematic designator C48)
C48_Cabinet3 "CAP 100nF 50V 0805(2012)" 2012[0805]06CD 41253.43,32736 r90 top (schematic designator C48)
C48_Cabinet4 "CAP 100nF 50V 0805(2012)" 2012[0805]06CD 41770.43,32736 r90 top (schematic designator C48)
C48_Cabinet5 "CAP 100nF 50V 0805(2012)" 2012[0805]06CD 42287.43,32734.49 r90 top (schematic designator C48)
C48_Cabinet6 "CAP 100nF 50V 0805(2012)" 2012[0805]06CD 42819.43,32739.49 r90 top (schematic designator C48)
C48_Cabinet7 "CAP 100nF 50V 0805(2012)" 2012[0805]06CD 41889.51,33987.43 r180 top (schematic designator C48)
C48_Cabinet8 "CAP 100nF 50V 0805(2012)" 2012[0805]06CD 41889.51,34535.43 r180 top (schematic designator C48)
C48_Cabinet9 "CAP 100nF 50V 0805(2012)" 2012[0805]06CD 40841.57,35391.51 r270 top (schematic designator C48)
C48_Cabinet10 "CAP 100nF 50V 0805(2012)" 2012[0805]06CD 41492.57,35394.51 r270 top (schematic designator C48)
C48_Cabinet11 "CAP 100nF 50V 0805(2012)" 2012[0805]06CD 42399.57,35392.51 r270 top (schematic designator C48)
C48_Cabinet12 "CAP 100nF 50V 0805(2012)" 2012[0805]06CD 42988.57,35376.51 r270 top (schematic designator C48)
C48_Cabinet13 "CAP 100nF 50V 0805(2012)" 2012[0805]06CD 44131.02,32871.2 r180 top (schematic designator C48)
C48_Cabinet14 "CAP 100nF 50V 0805(2012)" 2012[0805]06CD 44122,33463.43 r180 top (schematic designator C48)
C48_Cabinet15 "CAP 100nF 50V 0805(2012)" 2012[0805]06CD 44119.51,34064.43 r180 top (schematic designator C48)
C48_Cabinet16 "CAP 100nF 50V 0805(2012)" 2012[0805]06CD 44113.51,34607.43 r180 top (schematic designator C48)
C48_Cabinet17 "CAP 100nF 50V 0805(2012)" 2012[0805]06CD 44113.51,35124.43 r180 top (schematic designator C48)
C48_Cabinet18 "CAP 100nF 50V 0805(2012)" 2012[0805]06CD 44113.51,35641.43 r180 top (schematic designator C48)
C48_Cabinet19 "CAP 100nF 50V 0805(2012)" 2012[0805]06CD 45574.51,32956.43 r180 top (schematic designator C48)
C48_Cabinet20 "CAP 100nF 50V 0805(2012)" 2012[0805]06CD 45574.51,33473.43 r180 top (schematic designator C48)
C48_Cabinet21 "CAP 100nF 50V 0805(2012)" 2012[0805]06CD 45563,33997.43 r180 top (schematic designator C48)
C48_Cabinet22 "CAP 100nF 50V 0805(2012)" 2012[0805]06CD 45562.51,34520.43 r180 top (schematic designator C48)
C48_Cabinet23 "CAP 100nF 50V 0805(2012)" 2012[0805]06CD 45549.51,35047.43 r180 top (schematic designator C48)
C48_Cabinet24 "CAP 100nF 50V 0805(2012)" 2012[0805]06CD 45555.51,35574.43 r180 top (schematic designator C48)
CP1 "TAJA106K016RNJ" 3216[1206]CB 39517,32531 r0 top
CP2 "TAJA106K016RNJ" 3216[1206]CB 39615,33605 r0 top
CP3 "TAJA106K016RNJ" 3216[1206]CB 39765,33655 r270 top
CP4 "TAJA106K016RNJ" 3216[1206]CB 38020,34474 r0 top
CP5_Cabinet1 "TAJA106K016RNJ" 3216[1206]CB 39818,33165 r90 top (schematic designator CP5)
CP5_Cabinet2 "TAJA106K016RNJ" 3216[1206]CB 40335,33165 r90 top (schematic designator CP5)
CP5_Cabinet3 "TAJA106K016RNJ" 3216[1206]CB 40852,33165 r90 top (schematic designator CP5)
CP5_Cabinet4 "TAJA106K016RNJ" 3216[1206]CB 41369,33165 r90 top (schematic designator CP5)
CP5_Cabinet5 "TAJA106K016RNJ" 3216[1206]CB 41886,33163.49 r90 top (schematic designator CP5)
CP5_Cabinet6 "TAJA106K016RNJ" 3216[1206]CB 42418,33168.49 r90 top (schematic designator CP5)
CP5_Cabinet7 "TAJA106K016RNJ" 3216[1206]CB 41460.51,33586 r180 top (schematic designator CP5)
CP5_Cabinet8 "TAJA106K016RNJ" 3216[1206]CB 41460.51,34134 r180 top (schematic designator CP5)
CP5_Cabinet9 "TAJA106K016RNJ" 3216[1206]CB 41243,34962.51 r270 top (schematic designator CP5)
CP5_Cabinet10 "TAJA106K016RNJ" 3216[1206]CB 41894,34965.51 r270 top (schematic designator CP5)
CP5_Cabinet11 "TAJA106K016RNJ" 3216[1206]CB 42801,34963.51 r270 top (schematic designator CP5)
CP5_Cabinet12 "TAJA106K016RNJ" 3216[1206]CB 43390,34947.51 r270 top (schematic designator CP5)
CP5_Cabinet13 "TAJA106K016RNJ" 3216[1206]CB 43702.02,32469.76 r180 top (schematic designator CP5)
CP5_Cabinet14 "TAJA106K016RNJ" 3216[1206]CB 43693,33062 r180 top (schematic designator CP5)
CP5_Cabinet15 "TAJA106K016RNJ" 3216[1206]CB 43690.51,33663 r180 top (schematic designator CP5)
CP5_Cabinet16 "TAJA106K016RNJ" 3216[1206]CB 43684.51,34206 r180 top (schematic designator CP5)
CP5_Cabinet17 "TAJA106K016RNJ" 3216[1206]CB 43684.51,34723 r180 top (schematic designator CP5)
CP5_Cabinet18 "TAJA106K016RNJ" 3216[1206]CB 43684.51,35240 r180 top (schematic designator CP5)
CP5_Cabinet19 "TAJA106K016RNJ" 3216[1206]CB 45145.51,32555 r180 top (schematic designator CP5)
CP5_Cabinet20 "TAJA106K016RNJ" 3216[1206]CB 45145.51,33072 r180 top (schematic designator CP5)
CP5_Cabinet21 "TAJA106K016RNJ" 3216[1206]CB 45134,33596 r180 top (schematic designator CP5)
CP5_Cabinet22 "TAJA106K016RNJ" 3216[1206]CB 45133.51,34119 r180 top (schematic designator CP5)
CP5_Cabinet23 "TAJA106K016RNJ" 3216[1206]CB 45120.51,34646 r180 top (schematic designator CP5)
CP5_Cabinet24 "TAJA106K016RNJ" 3216[1206]CB 45126.51,35173 r180 top (schematic designator CP5)
D1 "1N4007" DO-214AC/SMA 37835,35447.91 r0 top
D2 "1N4148W-V-GS08" SOD123 39435,34268 r0 top
D3 "1N4148(T4)" SOD123 38940,34375 r180 top
D4 "1N4007" DO-214AC/SMA 38255,33625 r0 top
D5 "1N4007" DO-214AC/SMA 39415,33380 r0 top
D6 "SMBJ33CA" DO-214AA/SMB 38265,33780 r0 top
D7 "SS14-E3/5AT" VISH-DO-214AC-2_V 38900,33435 r90 top
J1 "MUP-C745" SIM_MUP-C745 39450,35114 r90 top
J2 "HR911105A" HR911105A 37756.35,32866.24 r180 top
J3 "PWR2.5" KLD-0202 37510,33570 r0 top
L1 "SLF7045T-330M1R1-H" INDP5050X28N 38260,33440 r0 top
L2 "SLF7045T-330M1R1-H" INDP5050X28N 39115,33445 r0 top
LED1 "LED-R" 0805LED 37833,34718.91 r90 top
LED2 "LED-R" 0805LED 37725,35572.91 r180 top
LED3 "LED-R" 0805LED 37598,34718.91 r90 top
LED4 "LED-R" 0805LED 37865,34045 r90 top
LED5_Cabinet1 "" 0805LED 40176.43,32879 r180 top (schematic designator LED5)
LED5_Cabinet2 "" 0805LED 40693.43,32879 r180 top (schematic designator LED5)
LED5_Cabinet3 "" 0805LED 41210.43,32879 r180 top (schematic designator LED5)
LED5_Cabinet4 "" 0805LED 41727.43,32879 r180 top (schematic designator LED5)
LED5_Cabinet5 "" 0805LED 42244.43,32877.49 r180 top (schematic designator LED5)
LED5_Cabinet6 "" 0805LED 42776.43,32882.49 r180 top (schematic designator LED5)
LED5_Cabinet7 "" 0805LED 41746.51,33944.43 r270 top (schematic designator LED5)
LED5_Cabinet8 "" 0805LED 41746.51,34492.43 r270 top (schematic designator LED5)
LED5_Cabinet9 "" 0805LED 40884.57,35248.51 r0 top (schematic designator LED5)
LED5_Cabinet10 "" 0805LED 41535.57,35251.51 r0 top (schematic designator LED5)
LED5_Cabinet11 "" 0805LED 42442.57,35249.51 r0 top (schematic designator LED5)
LED5_Cabinet12 "" 0805LED 43031.57,35233.51 r0 top (schematic designator LED5)
LED5_Cabinet13 "" 0805LED 43988.02,32828.2 r270 top (schematic designator LED5)
LED5_Cabinet14 "" 0805LED 43979,33420.43 r270 top (schematic designator LED5)
LED5_Cabinet15 "" 0805LED 43976.51,34021.43 r270 top (schematic designator LED5)
LED5_Cabinet16 "" 0805LED 43970.51,34564.43 r270 top (schematic designator LED5)
LED5_Cabinet17 "" 0805LED 43970.51,35081.43 r270 top (schematic designator LED5)
LED5_Cabinet18 "" 0805LED 43970.51,35598.43 r270 top (schematic designator LED5)
LED5_Cabinet19 "" 0805LED 45431.51,32913.43 r270 top (schematic designator LED5)
LED5_Cabinet20 "" 0805LED 45431.51,33430.43 r270 top (schematic designator LED5)
LED5_Cabinet21 "" 0805LED 45420,33954.43 r270 top (schematic designator LED5)
LED5_Cabinet22 "" 0805LED 45419.51,34477.43 r270 top (schematic designator LED5)
LED5_Cabinet23 "" 0805LED 45406.51,35004.43 r270 top (schematic designator LED5)
LED5_Cabinet24 "" 0805LED 45412.51,35531.43 r270 top (schematic designator LED5)
LED6_Cabinet1 "" 0805LED 39897,33167 r270 top (schematic designator LED6)
LED6_Cabinet2 "" 0805LED 40414,33167 r270 top (schematic designator LED6)
LED6_Cabinet3 "" 0805LED 40931,33167 r270 top (schematic designator LED6)
LED6_Cabinet4 "" 0805LED 41448,33167 r270 top (schematic designator LED6)
LED6_Cabinet5 "" 0805LED 41965,33165.49 r270 top (schematic designator LED6)
LED6_Cabinet6 "" 0805LED 42497,33170.49 r270 top (schematic designator LED6)
LED6_Cabinet7 "" 0805LED 41458.51,33665 r0 top (schematic designator LED6)
LED6_Cabinet8 "" 0805LED 41458.51,34213 r0 top (schematic designator LED6)
LED6_Cabinet9 "" 0805LED 41164,34960.51 r90 top (schematic designator LED6)
LED6_Cabinet10 "" 0805LED 41815,34963.51 r90 top (schematic designator LED6)
LED6_Cabinet11 "" 0805LED 42722,34961.51 r90 top (schematic designator LED6)
LED6_Cabinet12 "" 0805LED 43311,34945.51 r90 top (schematic designator LED6)
LED6_Cabinet13 "" 0805LED 43700.02,32548.76 r0 top (schematic designator LED6)
LED6_Cabinet14 "" 0805LED 43691,33141 r0 top (schematic designator LED6)
LED6_Cabinet15 "" 0805LED 43688.51,33742 r0 top (schematic designator LED6)
LED6_Cabinet16 "" 0805LED 43682.51,34285 r0 top (schematic designator LED6)
LED6_Cabinet17 "" 0805LED 43682.51,34802 r0 top (schematic designator LED6)
LED6_Cabinet18 "" 0805LED 43682.51,35319 r0 top (schematic designator LED6)
LED6_Cabinet19 "" 0805LED 45143.51,32634 r0 top (schematic designator LED6)
LED6_Cabinet20 "" 0805LED 45143.51,33151 r0 top (schematic designator LED6)
LED6_Cabinet21 "" 0805LED 45132,33675 r0 top (schematic designator LED6)
LED6_Cabinet22 "" 0805LED 45131.51,34198 r0 top (schematic designator LED6)
LED6_Cabinet23 "" 0805LED 45118.51,34725 r0 top (schematic designator LED6)
LED6_Cabinet24 "" 0805LED 45124.51,35252 r0 top (schematic designator LED6)
LR1 "MPZ2012S221A" 2012[0805]RL 39329,32530 r0 top
LR2 "MPZ2012S221A" 2012[0805]RL 39780,33450 r270 top
LR3 "MPZ2012S221A" 2012[0805]RL 39765,33835 r270 top
LR4 "MPZ2012S221A" 2012[0805]RL 40635,33468 r0 top
LR5 "MPZ2012S221A" 2012[0805]RL 40590,34587 r0 top
LR6 "MPZ2012S221A" 2012[0805]RL 40593,34339 r0 top
LR7 "MPZ2012S221A" 2012[0805]RL 39261,34261 r270 top
LR8 "MPZ2012S221A" 2012[0805]RL 39585,33480 r0 top
P1 "COAX-M" SMA-2 37585,34982.91 r0 top
P2 "Header 4" HDR1X4 39293,34466 r0 top
P3 "Header 2" 2EDGR-5.08-2P 37715,34065 r270 top
P4 "Header 2" Power-2P 37715,33333 r90 top
P5_Cabinet1 "Header 3" HDR1X3 40132,32490 r180 top (schematic designator P5)
P5_Cabinet2 "Header 3" HDR1X3 40649,32490 r180 top (schematic designator P5)
P5_Cabinet3 "Header 3" HDR1X3 41166,32490 r180 top (schematic designator P5)
P5_Cabinet4 "Header 3" HDR1X3 41683,32490 r180 top (schematic designator P5)
P5_Cabinet5 "Header 3" HDR1X3 42200,32488.49 r180 top (schematic designator P5)
P5_Cabinet6 "Header 3" HDR1X3 42732,32493.49 r180 top (schematic designator P5)
P5_Cabinet7 "Header 3" HDR1X3 42135.51,33900 r270 top (schematic designator P5)
P5_Cabinet8 "Header 3" HDR1X3 42135.51,34448 r270 top (schematic designator P5)
P5_Cabinet9 "Header 3" HDR1X3 40929,35637.51 r0 top (schematic designator P5)
P5_Cabinet10 "Header 3" HDR1X3 41580,35640.51 r0 top (schematic designator P5)
P5_Cabinet11 "Header 3" HDR1X3 42487,35638.51 r0 top (schematic designator P5)
P5_Cabinet12 "Header 3" HDR1X3 43076,35622.51 r0 top (schematic designator P5)
P5_Cabinet13 "Header 3" HDR1X3 44377.02,32783.76 r270 top (schematic designator P5)
P5_Cabinet14 "Header 3" HDR1X3 44368,33376 r270 top (schematic designator P5)
P5_Cabinet15 "Header 3" HDR1X3 44365.51,33977 r270 top (schematic designator P5)
P5_Cabinet16 "Header 3" HDR1X3 44359.51,34520 r270 top (schematic designator P5)
P5_Cabinet17 "Header 3" HDR1X3 44359.51,35037 r270 top (schematic designator P5)
P5_Cabinet18 "Header 3" HDR1X3 44359.51,35554 r270 top (schematic designator P5)
P5_Cabinet19 "Header 3" HDR1X3 45820.51,32869 r270 top (schematic designator P5)
P5_Cabinet20 "Header 3" HDR1X3 45820.51,33386 r270 top (schematic designator P5)
P5_Cabinet21 "Header 3" HDR1X3 45809,33910 r270 top (schematic designator P5)
P5_Cabinet22 "Header 3" HDR1X3 45808.51,34433 r270 top (schematic designator P5)
P5_Cabinet23 "Header 3" HDR1X3 45795.51,34960 r270 top (schematic designator P5)
P5_Cabinet24 "Header 3" HDR1X3 45801.51,35487 r270 top (schematic designator P5)
Q1 "MMBT3904" SOT23_N 39190,34856.34 r180 top
Q2 "MMBT3904" SOT23_N 39275,34666.34 r180 top
Q3 "MMBT3904" SOT23_N 38290,34425 r270 top
Q4 "MMBT3906" SOT23B_N 38565,34432 r270 top
Q5_Cabinet1 "MMBT3906" SOT23B_N 40173.43,32995 r90 top (schematic designator Q5)
Q5_Cabinet2 "MMBT3906" SOT23B_N 40690.43,32995 r90 top (schematic designator Q5)
Q5_Cabinet3 "MMBT3906" SOT23B_N 41207.43,32995 r90 top (schematic designator Q5)
Q5_Cabinet4 "MMBT3906" SOT23B_N 41724.43,32995 r90 top (schematic designator Q5)
Q5_Cabinet5 "MMBT3906" SOT23B_N 42241.43,32993.49 r90 top (schematic designator Q5)
Q5_Cabinet6 "MMBT3906" SOT23B_N 42773.43,32998.49 r90 top (schematic designator Q5)
Q5_Cabinet7 "MMBT3906" SOT23B_N 41630.51,33941.43 r180 top (schematic designator Q5)
Q5_Cabinet8 "MMBT3906" SOT23B_N 41630.51,34489.43 r180 top (schematic designator Q5)
Q5_Cabinet9 "MMBT3906" SOT23B_N 40887.57,35132.51 r270 top (schematic designator Q5)
Q5_Cabinet10 "MMBT3906" SOT23B_N 41538.57,35135.51 r270 top (schematic designator Q5)
Q5_Cabinet11 "MMBT3906" SOT23B_N 42445.57,35133.51 r270 top (schematic designator Q5)
Q5_Cabinet12 "MMBT3906" SOT23B_N 43034.57,35117.51 r270 top (schematic designator Q5)
Q5_Cabinet13 "MMBT3906" SOT23B_N 43872.02,32825.2 r180 top (schematic designator Q5)
Q5_Cabinet14 "MMBT3906" SOT23B_N 43863,33417.43 r180 top (schematic designator Q5)
Q5_Cabinet15 "MMBT3906" SOT23B_N 43860.51,34018.43 r180 top (schematic designator Q5)
Q5_Cabinet16 "MMBT3906" SOT23B_N 43854.51,34561.43 r180 top (schematic designator Q5)
Q5_Cabinet17 "MMBT3906" SOT23B_N 43854.51,35078.43 r180 top (schematic designator Q5)
Q5_Cabinet18 "MMBT3906" SOT23B_N 43854.51,35595.43 r180 top (schematic designator Q5)
Q5_Cabinet19 "MMBT3906" SOT23B_N 45315.51,32910.43 r180 top (schematic designator Q5)
Q5_Cabinet20 "MMBT3906" SOT23B_N 45315.51,33427.43 r180 top (schematic designator Q5)
Q5_Cabinet21 "MMBT3906" SOT23B_N 45304,33951.43 r180 top (schematic designator Q5)
Q5_Cabinet22 "MMBT3906" SOT23B_N 45303.51,34474.43 r180 top (schematic designator Q5)
Q5_Cabinet23 "MMBT3906" SOT23B_N 45290.51,35001.43 r180 top (schematic designator Q5)
Q5_Cabinet24 "MMBT3906" SOT23B_N 45296.51,35528.43 r180 top (schematic designator Q5)
Q6_Cabinet1 "MMBT3904" SOT23_N 40013,33165 r270 top (schematic designator Q6)
Q6_Cabinet2 "MMBT3904" SOT23_N 40530,33165 r270 top (schematic designator Q6)
Q6_Cabinet3 "MMBT3904" SOT23_N 41047,33165 r270 top (schematic designator Q6)
Q6_Cabinet4 "MMBT3904" SOT23_N 41564,33165 r270 top (schematic designator Q6)
Q6_Cabinet5 "MMBT3904" SOT23_N 42081,33163.49 r270 top (schematic designator Q6)
Q6_Cabinet6 "MMBT3904" SOT23_N 42613,33168.49 r270 top (schematic designator Q6)
Q6_Cabinet7 "MMBT3904" SOT23_N 41460.51,33781 r0 top (schematic designator Q6)
Q6_Cabinet8 "MMBT3904" SOT23_N 41460.51,34329 r0 top (schematic designator Q6)
Q6_Cabinet9 "MMBT3904" SOT23_N 41048,34962.51 r90 top (schematic designator Q6)
Q6_Cabinet10 "MMBT3904" SOT23_N 41699,34965.51 r90 top (schematic designator Q6)
Q6_Cabinet11 "MMBT3904" SOT23_N 42606,34963.51 r90 top (schematic designator Q6)
Q6_Cabinet12 "MMBT3904" SOT23_N 43195,34947.51 r90 top (schematic designator Q6)
Q6_Cabinet13 "MMBT3904" SOT23_N 43702.02,32664.76 r0 top (schematic designator Q6)
Q6_Cabinet14 "MMBT3904" SOT23_N 43693,33257 r0 top (schematic designator Q6)
Q6_Cabinet15 "MMBT3904" SOT23_N 43690.51,33858 r0 top (schematic designator Q6)
Q6_Cabinet16 "MMBT3904" SOT23_N 43684.51,34401 r0 top (schematic designator Q6)
Q6_Cabinet17 "MMBT3904" SOT23_N 43684.51,34918 r0 top (schematic designator Q6)
Q6_Cabinet18 "MMBT3904" SOT23_N 43684.51,35435 r0 top (schematic designator Q6)
Q6_Cabinet19 "MMBT3904" SOT23_N 45145.51,32750 r0 top (schematic designator Q6)
Q6_Cabinet20 "MMBT3904" SOT23_N 45145.51,33267 r0 top (schematic designator Q6)
Q6_Cabinet21 "MMBT3904" SOT23_N 45134,33791 r0 top (schematic designator Q6)
Q6_Cabinet22 "MMBT3904" SOT23_N 45133.51,34314 r0 top (schematic designator Q6)
Q6_Cabinet23 "MMBT3904" SOT23_N 45120.51,34841 r0 top (schematic designator Q6)
Q6_Cabinet24 "MMBT3904" SOT23_N 45126.51,35368 r0 top (schematic designator Q6)
R1 "CRCW0603120RFKEA" 2012[0805]R 37867,34999 r0 top
R2 "1K 1% 0805(2012)" 2012[0805]R 37923,34718.91 r270 top
R3 "1K 1% 0805(2012)" 2012[0805]R 37900,35567.91 r0 top
R4 "1K 1% 0805(2012)" 2012[0805]R 39565,34841.34 r0 top
R5 "10K 1% 0805(2012)" 2012[0805]R 39390,34841.34 r180 top
R6 "1K 1% 0805(2012)" 2012[0805]R 37688,34718.91 r90 top
R7 "CRCW0603100KFKEA" 2012[0805]R 39190,35424 r0 top
R8 "CRCW060322R0FKEA" 2012[0805]R 39190,35196.34 r0 top
R9 "1K 1% 0805(2012)" 2012[0805]R 39520,34671.34 r270 top
R10 "10K 1% 0805(2012)" 2012[0805]R 39420,34671.34 r90 top
R11 "CRCW060322R0FKEA" 2012[0805]R 39190,35271.34 r0 top
R12 "CRCW060322R0FKEA" 2012[0805]R 39190,35346.34 r0 top
R13 "CRCW06031K00FKEA" 2012[0805]R 39770.43,34846.34 r0 top
R14 "CRCW06031K00FKEA" 2012[0805]R 40075.57,34849 r0 top
R15 "CRCW060310K0FKEA" 2012[0805]R 39920.43,34846.34 r0 top
R16 "CRCW060310K0FKEA" 2012[0805]R 40225.57,34849 r0 top
R17 "10K 1% 0805(2012)" 2012[0805]R 38923.87,33186.24 r270 top
R18 "10K 1% 0805(2012)" 2012[0805]R 38823.87,33186.24 r270 top
R19 "10K 1% 0805(2012)" 2012[0805]R 38728.87,33186.24 r270 top
R20 "10K 1% 0805(2012)" 2012[0805]R 39618,33186 r270 top
R21 "10K 1% 0805(2012)" 2012[0805]R 39035,33185 r270 top
R22 "10K 1% 0805(2012)" 2012[0805]R 39135,33185 r270 top
R23 "10K 1% 0805(2012)" 2012[0805]R 39238.87,33186.24 r270 top
R24 "10K 1% 0805(2012)" 2012[0805]R 39335,33185 r270 top
R25 "10K 1% 0805(2012)" 2012[0805]R 39435,33185 r270 top
R26 "1M 1% 0805(2012)" 2012[0805]R 39395,32703 r0 top
R27 "12K4 1% 0805(2012)" 2012[0805]R 38520,32610 r90 top
R28 "10R 5% 0805(2012)" 2012[0805]R 38625,33085 r270 top
R29 "10K 1% 0805(2012)" 2012[0805]R 39155.43,32535 r270 top
R30 "51R 5% 0805(2012)" 2012[0805]R 38456.35,33086.24 r90 top
R31 "51R 5% 0805(2012)" 2012[0805]R 38531.35,33086.24 r90 top
R32 "82R 5% 0805(2012)" 2012[0805]R 38478.76,32721.24 r0 top
R33 "82R 5% 0805(2012)" 2012[0805]R 38478.76,32951.24 r0 top
R34 "270R 5% 0805(2012)" 2012[0805]R 38495.43,33200 r180 top
R35 "270R 5% 0805(2012)" 2012[0805]R 38486.35,32496.24 r180 top
R36 "1K 1% 0805(2012)" 2012[0805]R 40589,34034 r0 top
R37 "10K 1% 0805(2012)" 2012[0805]R 40728,34582 r90 top
R38 "10M 1% 0805(2012)" 2012[0805]R 40932,34267.57 r90 top
R39 "1K 1% 0805(2012)" 2012[0805]R 39880,33770 r270 top
R40 "CRCW0603120RFKEA" 2012[0805]R 39596,34271 r90 top
R41 "1K 1% 0805(2012)" 2012[0805]R 38020,33840 r180 top
R42 "10R 5% 0805(2012)" 2012[0805]R 40039,33448 r90 top
R43 "10K 1% 0805(2012)" 2012[0805]R 40078,34709 r0 top
R44 "10K 1% 0805(2012)" 2012[0805]R 39955,33450 r270 top
R45 "10K 1% 0805(2012)" 2012[0805]R 39870,33450 r270 top
R46 "10K 1% 0805(2012)" 2012[0805]R 38740,34380 r180 top
R47 "1K 1% 0805(2012)" 2012[0805]R 38420,34425 r90 top
R48 "1K 1% 0805(2012)" 2012[0805]R 38160,34425 r90 top
R49 "1K 1% 0805(2012)" 2012[0805]R 38740,34485 r180 top
R50 "10K 1% 0805(2012)" 2012[0805]R 38943,34484 r180 top
R51 "CRCW0603300KFKEA" 2012[0805]R 38307,33945 r0 top
R52 "CRCW060322R0FKEA" 2012[0805]R 38165,33945 r180 top
R53 "CRCW060322R0FKEA" 2012[0805]R 38020,33945 r180 top
R54 "10K 1% 0805(2012)" 2012[0805]R 37865,33870 r90 top
R55 "10K 1% 0805(2012)" 2012[0805]R 38690,33760 r90 top
R56 "10K 1% 0805(2012)" 2012[0805]R 38585,33760 r270 top
R57 "120R" 2012[0805]R 40746.57,33677 r270 top
R58_Cabinet1 "1K 1% 0805(2012)" 2012[0805]R 40138.43,32731 r90 top (schematic designator R58)
R58_Cabinet2 "1K 1% 0805(2012)" 2012[0805]R 40655.43,32731 r90 top (schematic designator R58)
R58_Cabinet3 "1K 1% 0805(2012)" 2012[0805]R 41172.43,32731 r90 top (schematic designator R58)
R58_Cabinet4 "1K 1% 0805(2012)" 2012[0805]R 41689.43,32731 r90 top (schematic designator R58)
R58_Cabinet5 "1K 1% 0805(2012)" 2012[0805]R 42206.43,32729.49 r90 top (schematic designator R58)
R58_Cabinet6 "1K 1% 0805(2012)" 2012[0805]R 42738.43,32734.49 r90 top (schematic designator R58)
R58_Cabinet7 "1K 1% 0805(2012)" 2012[0805]R 41894.51,33906.43 r180 top (schematic designator R58)
R58_Cabinet8 "1K 1% 0805(2012)" 2012[0805]R 41894.51,34454.43 r180 top (schematic designator R58)
R58_Cabinet9 "1K 1% 0805(2012)" 2012[0805]R 40922.57,35396.51 r270 top (schematic designator R58)
R58_Cabinet10 "1K 1% 0805(2012)" 2012[0805]R 41573.57,35399.51 r270 top (schematic designator R58)
R58_Cabinet11 "1K 1% 0805(2012)" 2012[0805]R 42480.57,35397.51 r270 top (schematic designator R58)
R58_Cabinet12 "1K 1% 0805(2012)" 2012[0805]R 43069.57,35381.51 r270 top (schematic designator R58)
R58_Cabinet13 "1K 1% 0805(2012)" 2012[0805]R 44136.02,32790.2 r180 top (schematic designator R58)
R58_Cabinet14 "1K 1% 0805(2012)" 2012[0805]R 44127,33382.43 r180 top (schematic designator R58)
R58_Cabinet15 "1K 1% 0805(2012)" 2012[0805]R 44124.51,33983.43 r180 top (schematic designator R58)
R58_Cabinet16 "1K 1% 0805(2012)" 2012[0805]R 44118.51,34526.43 r180 top (schematic designator R58)
R58_Cabinet17 "1K 1% 0805(2012)" 2012[0805]R 44118.51,35043.43 r180 top (schematic designator R58)
R58_Cabinet18 "1K 1% 0805(2012)" 2012[0805]R 44118.51,35560.43 r180 top (schematic designator R58)
R58_Cabinet19 "1K 1% 0805(2012)" 2012[0805]R 45579.51,32875.43 r180 top (schematic designator R58)
R58_Cabinet20 "1K 1% 0805(2012)" 2012[0805]R 45579.51,33392.43 r180 top (schematic designator R58)
R58_Cabinet21 "1K 1% 0805(2012)" 2012[0805]R 45568,33916.43 r180 top (schematic designator R58)
R58_Cabinet22 "1K 1% 0805(2012)" 2012[0805]R 45567.51,34439.43 r180 top (schematic designator R58)
R58_Cabinet23 "1K 1% 0805(2012)" 2012[0805]R 45554.51,34966.43 r180 top (schematic designator R58)
R58_Cabinet24 "1K 1% 0805(2012)" 2012[0805]R 45560.51,35493.43 r180 top (schematic designator R58)
R59_Cabinet1 "1K 1% 0805(2012)" 2012[0805]R 40174.43,32609 r180 top (schematic designator R59)
R59_Cabinet2 "1K 1% 0805(2012)" 2012[0805]R 40691.43,32609 r180 top (schematic designator R59)
R59_Cabinet3 "1K 1% 0805(2012)" 2012[0805]R 41208.43,32609 r180 top (schematic designator R59)
R59_Cabinet4 "1K 1% 0805(2012)" 2012[0805]R 41725.43,32609 r180 top (schematic designator R59)
R59_Cabinet5 "1K 1% 0805(2012)" 2012[0805]R 42242.43,32607.49 r180 top (schematic designator R59)
R59_Cabinet6 "1K 1% 0805(2012)" 2012[0805]R 42774.43,32612.49 r180 top (schematic designator R59)
R59_Cabinet7 "1K 1% 0805(2012)" 2012[0805]R 42016.51,33942.43 r270 top (schematic designator R59)
R59_Cabinet8 "1K 1% 0805(2012)" 2012[0805]R 42016.51,34490.43 r270 top (schematic designator R59)
R59_Cabinet9 "1K 1% 0805(2012)" 2012[0805]R 40886.57,35518.51 r0 top (schematic designator R59)
R59_Cabinet10 "1K 1% 0805(2012)" 2012[0805]R 41537.57,35521.51 r0 top (schematic designator R59)
R59_Cabinet11 "1K 1% 0805(2012)" 2012[0805]R 42444.57,35519.51 r0 top (schematic designator R59)
R59_Cabinet12 "1K 1% 0805(2012)" 2012[0805]R 43033.57,35503.51 r0 top (schematic designator R59)
R59_Cabinet13 "1K 1% 0805(2012)" 2012[0805]R 44258.02,32826.2 r270 top (schematic designator R59)
R59_Cabinet14 "1K 1% 0805(2012)" 2012[0805]R 44249,33418.43 r270 top (schematic designator R59)
R59_Cabinet15 "1K 1% 0805(2012)" 2012[0805]R 44246.51,34019.43 r270 top (schematic designator R59)
R59_Cabinet16 "1K 1% 0805(2012)" 2012[0805]R 44240.51,34562.43 r270 top (schematic designator R59)
R59_Cabinet17 "1K 1% 0805(2012)" 2012[0805]R 44240.51,35079.43 r270 top (schematic designator R59)
R59_Cabinet18 "1K 1% 0805(2012)" 2012[0805]R 44240.51,35596.43 r270 top (schematic designator R59)
R59_Cabinet19 "1K 1% 0805(2012)" 2012[0805]R 45701.51,32911.43 r270 top (schematic designator R59)
R59_Cabinet20 "1K 1% 0805(2012)" 2012[0805]R 45701.51,33428.43 r270 top (schematic designator R59)
R59_Cabinet21 "1K 1% 0805(2012)" 2012[0805]R 45690,33952.43 r270 top (schematic designator R59)
R59_Cabinet22 "1K 1% 0805(2012)" 2012[0805]R 45689.51,34475.43 r270 top (schematic designator R59)
R59_Cabinet23 "1K 1% 0805(2012)" 2012[0805]R 45676.51,35002.43 r270 top (schematic designator R59)
R59_Cabinet24 "1K 1% 0805(2012)" 2012[0805]R 45682.51,35529.43 r270 top (schematic designator R59)
R60_Cabinet1 "10K 1% 0805(2012)" 2012[0805]R 40183.43,33200 r0 top (schematic designator R60)
R60_Cabinet2 "10K 1% 0805(2012)" 2012[0805]R 40700.43,33200 r0 top (schematic designator R60)
R60_Cabinet3 "10K 1% 0805(2012)" 2012[0805]R 41217.43,33200 r0 top (schematic designator R60)
R60_Cabinet4 "10K 1% 0805(2012)" 2012[0805]R 41734.43,33200 r0 top (schematic designator R60)
R60_Cabinet5 "10K 1% 0805(2012)" 2012[0805]R 42251.43,33198.49 r0 top (schematic designator R60)
R60_Cabinet6 "10K 1% 0805(2012)" 2012[0805]R 42783.43,33203.49 r0 top (schematic designator R60)
R60_Cabinet7 "10K 1% 0805(2012)" 2012[0805]R 41425.51,33951.43 r90 top (schematic designator R60)
R60_Cabinet8 "10K 1% 0805(2012)" 2012[0805]R 41425.51,34499.43 r90 top (schematic designator R60)
R60_Cabinet9 "10K 1% 0805(2012)" 2012[0805]R 40877.57,34927.51 r180 top (schematic designator R60)
R60_Cabinet10 "10K 1% 0805(2012)" 2012[0805]R 41528.57,34930.51 r180 top (schematic designator R60)
R60_Cabinet11 "10K 1% 0805(2012)" 2012[0805]R 42435.57,34928.51 r180 top (schematic designator R60)
R60_Cabinet12 "10K 1% 0805(2012)" 2012[0805]R 43024.57,34912.51 r180 top (schematic designator R60)
R60_Cabinet13 "10K 1% 0805(2012)" 2012[0805]R 43667.02,32835.2 r90 top (schematic designator R60)
R60_Cabinet14 "10K 1% 0805(2012)" 2012[0805]R 43658,33427.43 r90 top (schematic designator R60)
R60_Cabinet15 "10K 1% 0805(2012)" 2012[0805]R 43655.51,34028.43 r90 top (schematic designator R60)
R60_Cabinet16 "10K 1% 0805(2012)" 2012[0805]R 43649.51,34571.43 r90 top (schematic designator R60)
R60_Cabinet17 "10K 1% 0805(2012)" 2012[0805]R 43649.51,35088.43 r90 top (schematic designator R60)
R60_Cabinet18 "10K 1% 0805(2012)" 2012[0805]R 43649.51,35605.43 r90 top (schematic designator R60)
R60_Cabinet19 "10K 1% 0805(2012)" 2012[0805]R 45110.51,32920.43 r90 top (schematic designator R60)
R60_Cabinet20 "10K 1% 0805(2012)" 2012[0805]R 45110.51,33437.43 r90 top (schematic designator R60)
R60_Cabinet21 "10K 1% 0805(2012)" 2012[0805]R 45099,33961.43 r90 top (schematic designator R60)
R60_Cabinet22 "10K 1% 0805(2012)" 2012[0805]R 45098.51,34484.43 r90 top (schematic designator R60)
R60_Cabinet23 "10K 1% 0805(2012)" 2012[0805]R 45085.51,35011.43 r90 top (schematic designator R60)
R60_Cabinet24 "10K 1% 0805(2012)" 2012[0805]R 45091.51,35538.43 r90 top (schematic designator R60)
R61_Cabinet1 "1K 1% 0805(2012)" 2012[0805]R 40184.43,33312 r0 top (schematic designator R61)
R61_Cabinet2 "1K 1% 0805(2012)" 2012[0805]R 40701.43,33312 r0 top (schematic designator R61)
R61_Cabinet3 "1K 1% 0805(2012)" 2012[0805]R 41218.43,33312 r0 top (schematic designator R61)
R61_Cabinet4 "1K 1% 0805(2012)" 2012[0805]R 41735.43,33312 r0 top (schematic designator R61)
R61_Cabinet5 "1K 1% 0805(2012)" 2012[0805]R 42252.43,33310.49 r0 top (schematic designator R61)
R61_Cabinet6 "1K 1% 0805(2012)" 2012[0805]R 42784.43,33315.49 r0 top (schematic designator R61)
R61_Cabinet7 "1K 1% 0805(2012)" 2012[0805]R 41313.51,33952.43 r90 top (schematic designator R61)
R61_Cabinet8 "1K 1% 0805(2012)" 2012[0805]R 41313.51,34500.43 r90 top (schematic designator R61)
R61_Cabinet9 "1K 1% 0805(2012)" 2012[0805]R 40876.57,34815.51 r180 top (schematic designator R61)
R61_Cabinet10 "1K 1% 0805(2012)" 2012[0805]R 41527.57,34818.51 r180 top (schematic designator R61)
R61_Cabinet11 "1K 1% 0805(2012)" 2012[0805]R 42434.57,34816.51 r180 top (schematic designator R61)
R61_Cabinet12 "1K 1% 0805(2012)" 2012[0805]R 43023.57,34800.51 r180 top (schematic designator R61)
R61_Cabinet13 "1K 1% 0805(2012)" 2012[0805]R 43555.02,32836.2 r90 top (schematic designator R61)
R61_Cabinet14 "1K 1% 0805(2012)" 2012[0805]R 43546,33428.43 r90 top (schematic designator R61)
R61_Cabinet15 "1K 1% 0805(2012)" 2012[0805]R 43543.51,34029.43 r90 top (schematic designator R61)
R61_Cabinet16 "1K 1% 0805(2012)" 2012[0805]R 43537.51,34572.43 r90 top (schematic designator R61)
R61_Cabinet17 "1K 1% 0805(2012)" 2012[0805]R 43537.51,35089.43 r90 top (schematic designator R61)
R61_Cabinet18 "1K 1% 0805(2012)" 2012[0805]R 43537.51,35606.43 r90 top (schematic designator R61)
R61_Cabinet19 "1K 1% 0805(2012)" 2012[0805]R 44998.51,32921.43 r90 top (schematic designator R61)
R61_Cabinet20 "1K 1% 0805(2012)" 2012[0805]R 44998.51,33438.43 r90 top (schematic designator R61)
R61_Cabinet21 "1K 1% 0805(2012)" 2012[0805]R 44987,33962.43 r90 top (schematic designator R61)
R61_Cabinet22 "1K 1% 0805(2012)" 2012[0805]R 44986.51,34485.43 r90 top (schematic designator R61)
R61_Cabinet23 "1K 1% 0805(2012)" 2012[0805]R 44973.51,35012.43 r90 top (schematic designator R61)
R61_Cabinet24 "1K 1% 0805(2012)" 2012[0805]R 44979.51,35539.43 r90 top (schematic designator R61)
R62_Cabinet1 "1K 1% 0805(2012)" 2012[0805]R 39863,33309 r180 top (schematic designator R62)
R62_Cabinet2 "1K 1% 0805(2012)" 2012[0805]R 40380,33309 r180 top (schematic designator R62)
R62_Cabinet3 "1K 1% 0805(2012)" 2012[0805]R 40897,33309 r180 top (schematic designator R62)
R62_Cabinet4 "1K 1% 0805(2012)" 2012[0805]R 41414,33309 r180 top (schematic designator R62)
R62_Cabinet5 "1K 1% 0805(2012)" 2012[0805]R 41931,33307.49 r180 top (schematic designator R62)
R62_Cabinet6 "1K 1% 0805(2012)" 2012[0805]R 42463,33312.49 r180 top (schematic designator R62)
R62_Cabinet7 "1K 1% 0805(2012)" 2012[0805]R 41316.51,33631 r270 top (schematic designator R62)
R62_Cabinet8 "1K 1% 0805(2012)" 2012[0805]R 41316.51,34179 r270 top (schematic designator R62)
R62_Cabinet9 "1K 1% 0805(2012)" 2012[0805]R 41198,34818.51 r0 top (schematic designator R62)
R62_Cabinet10 "1K 1% 0805(2012)" 2012[0805]R 41849,34821.51 r0 top (schematic designator R62)
R62_Cabinet11 "1K 1% 0805(2012)" 2012[0805]R 42756,34819.51 r0 top (schematic designator R62)